# EAGLE board warp-revB (EAGLE 9.4.2)
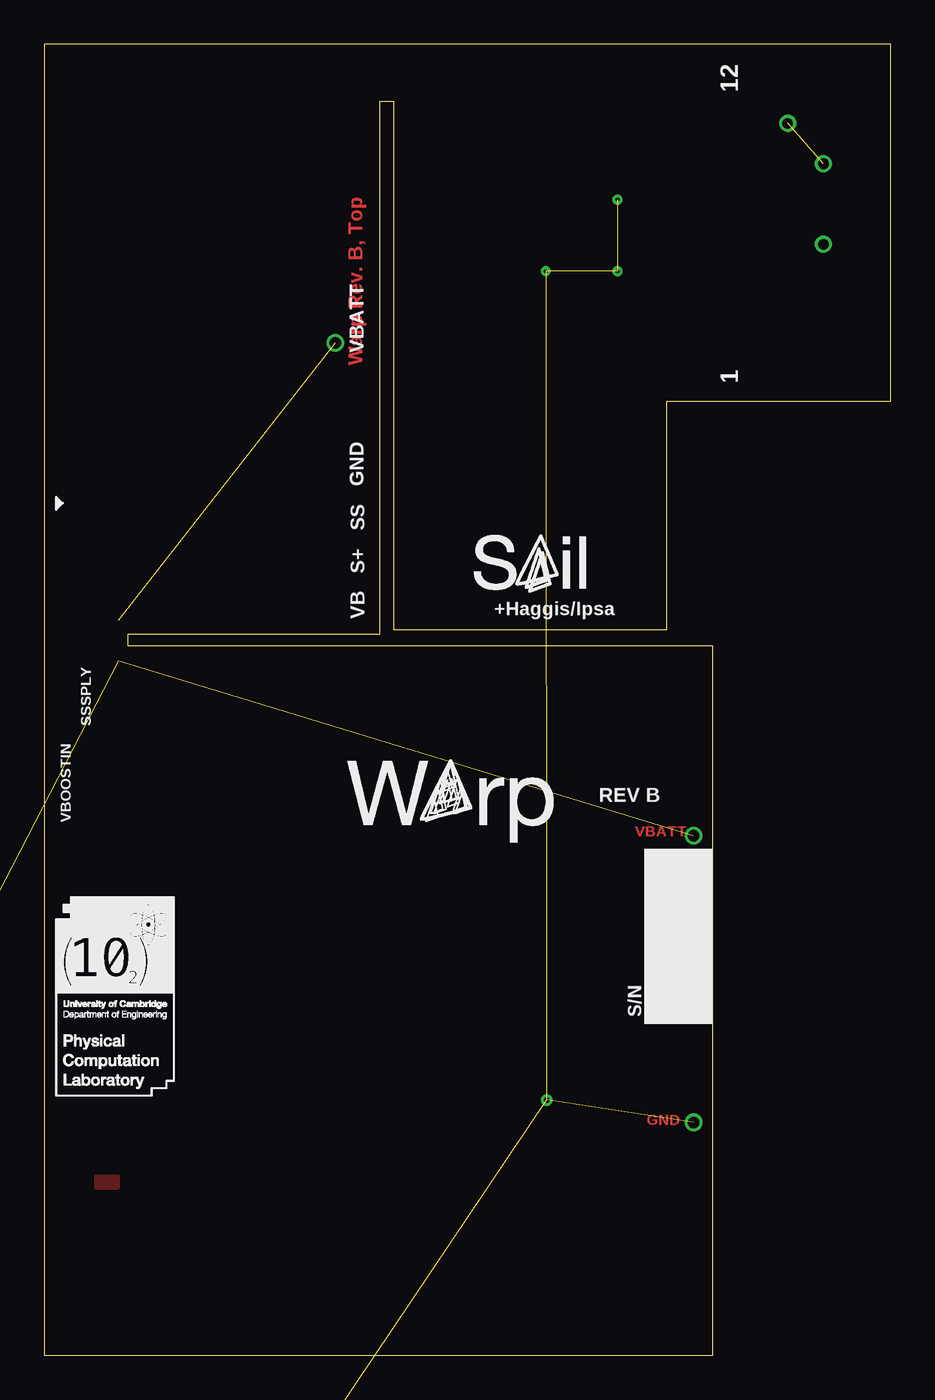
[diagram p0: board, top side]
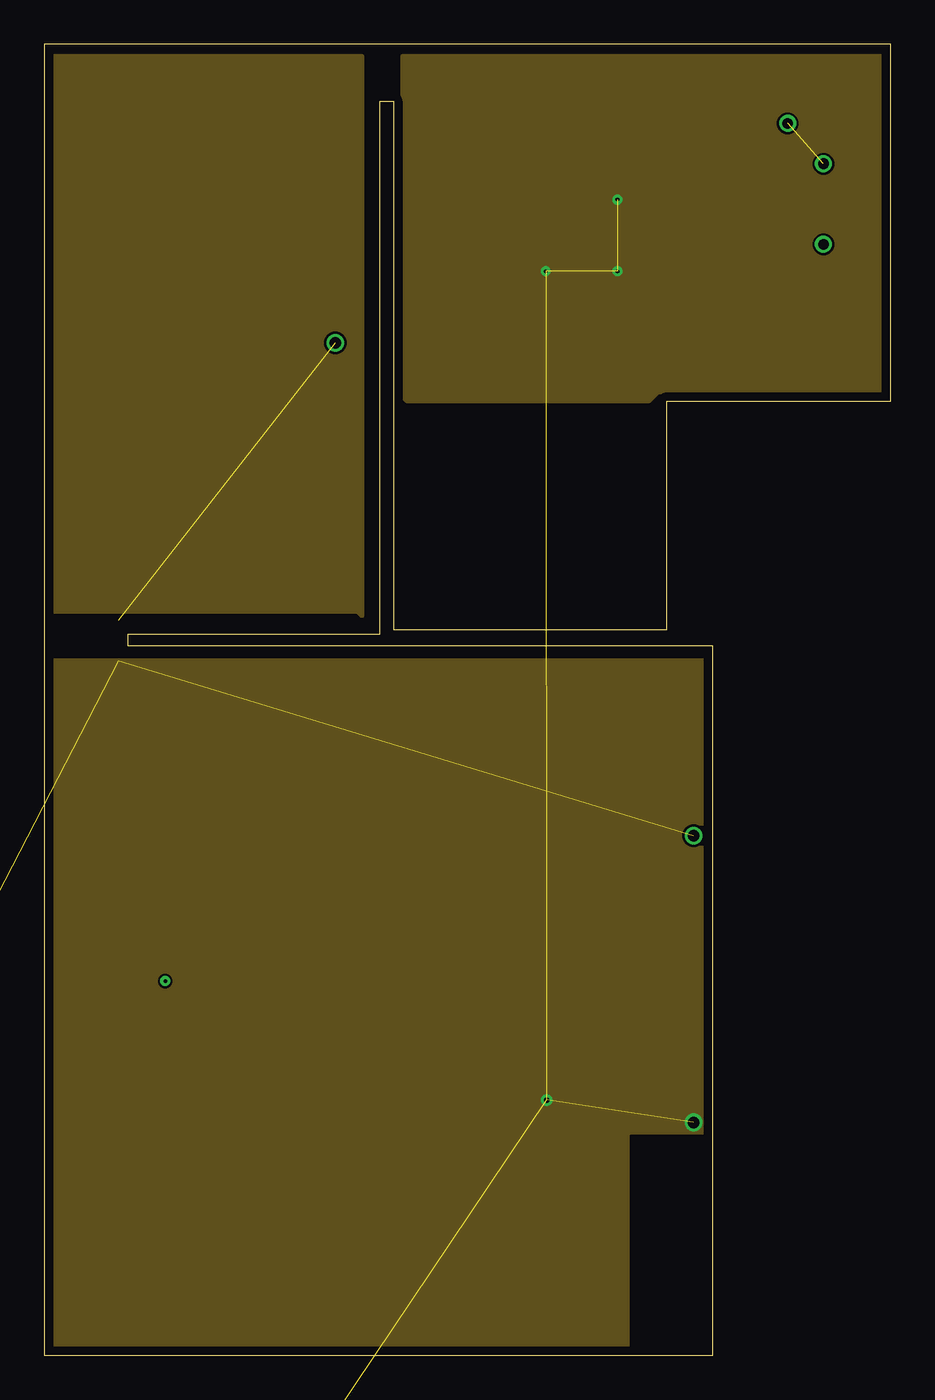
[diagram p1: board, inner layer Route2]
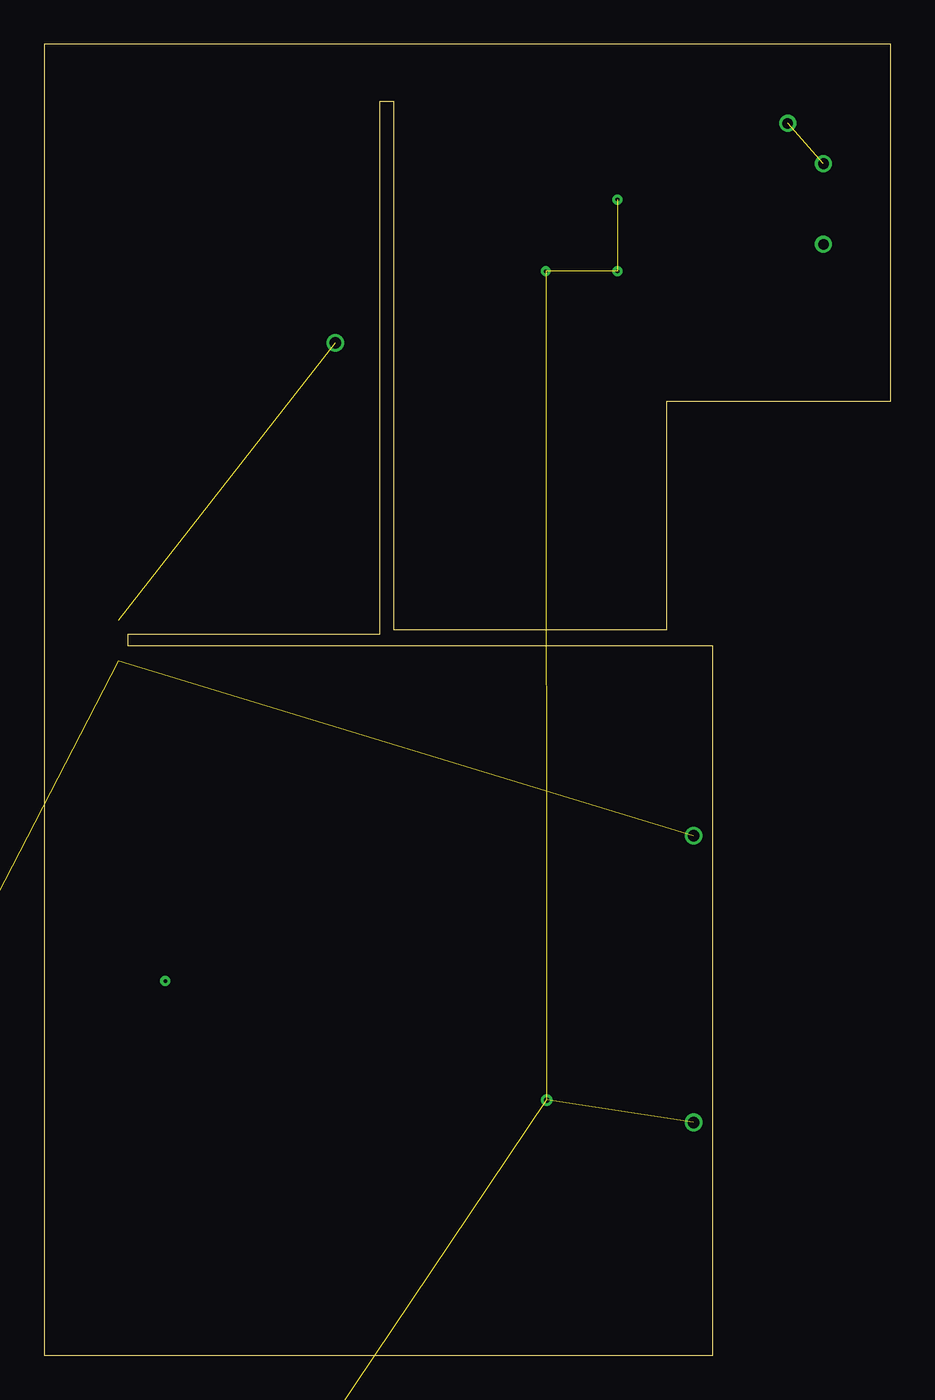
[diagram p2: board, inner layer Route3]
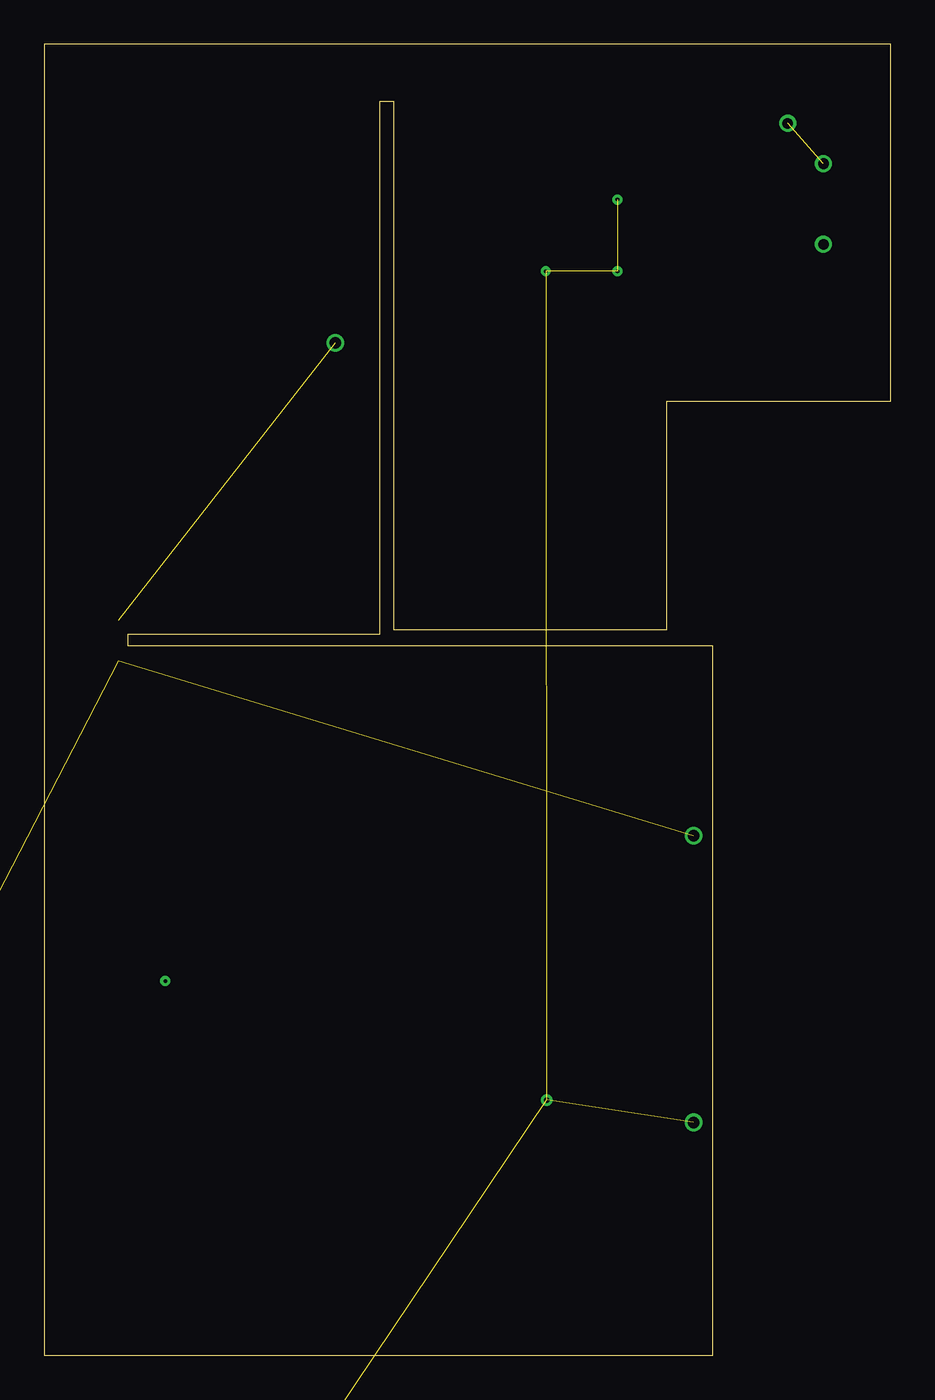
[diagram p3: board, inner layer Route4]
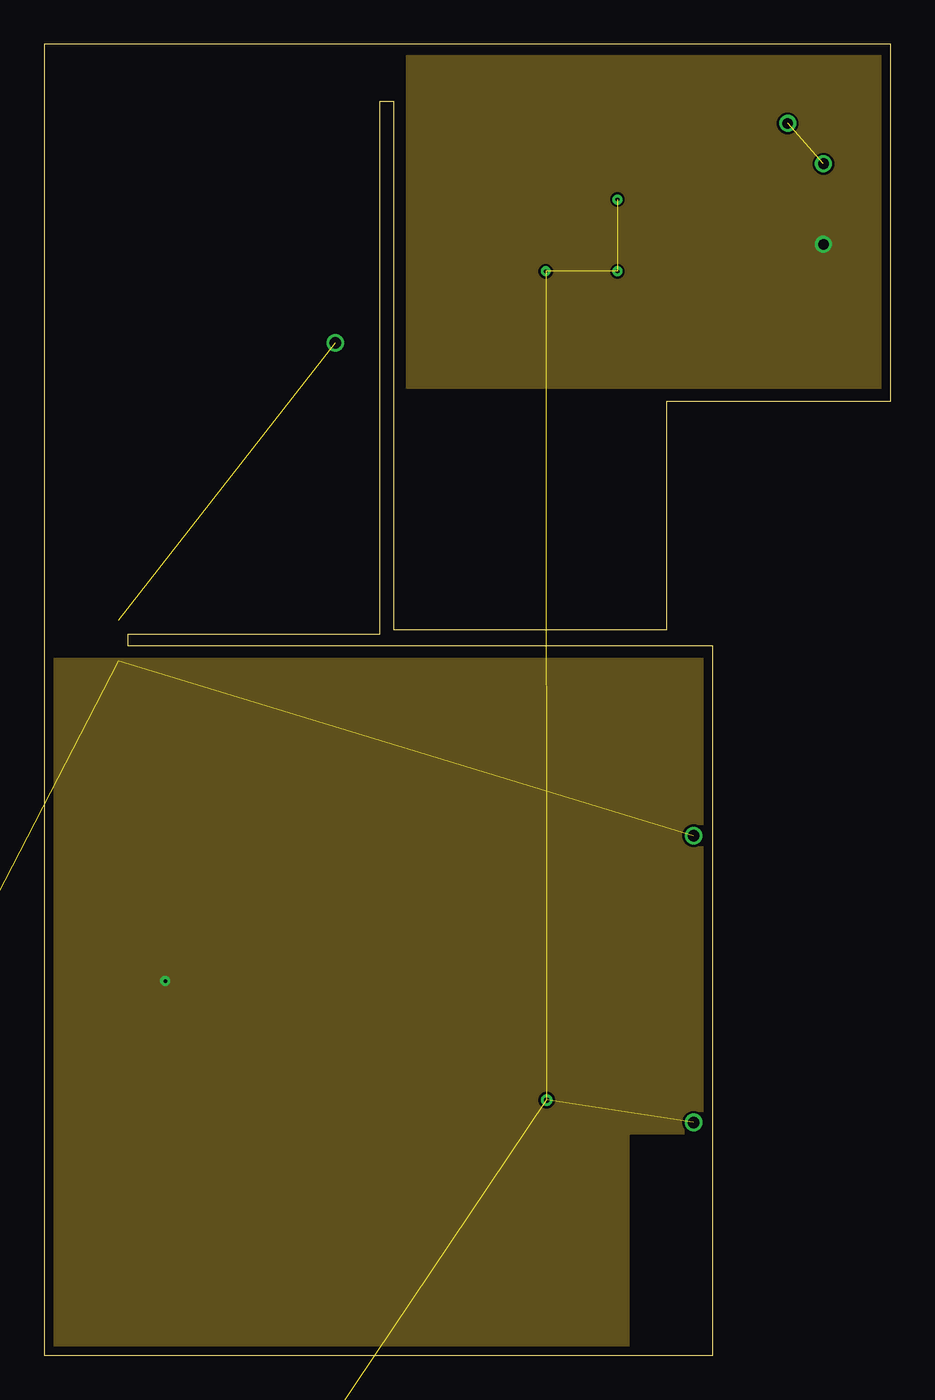
[diagram p4: board, inner layer Route5]
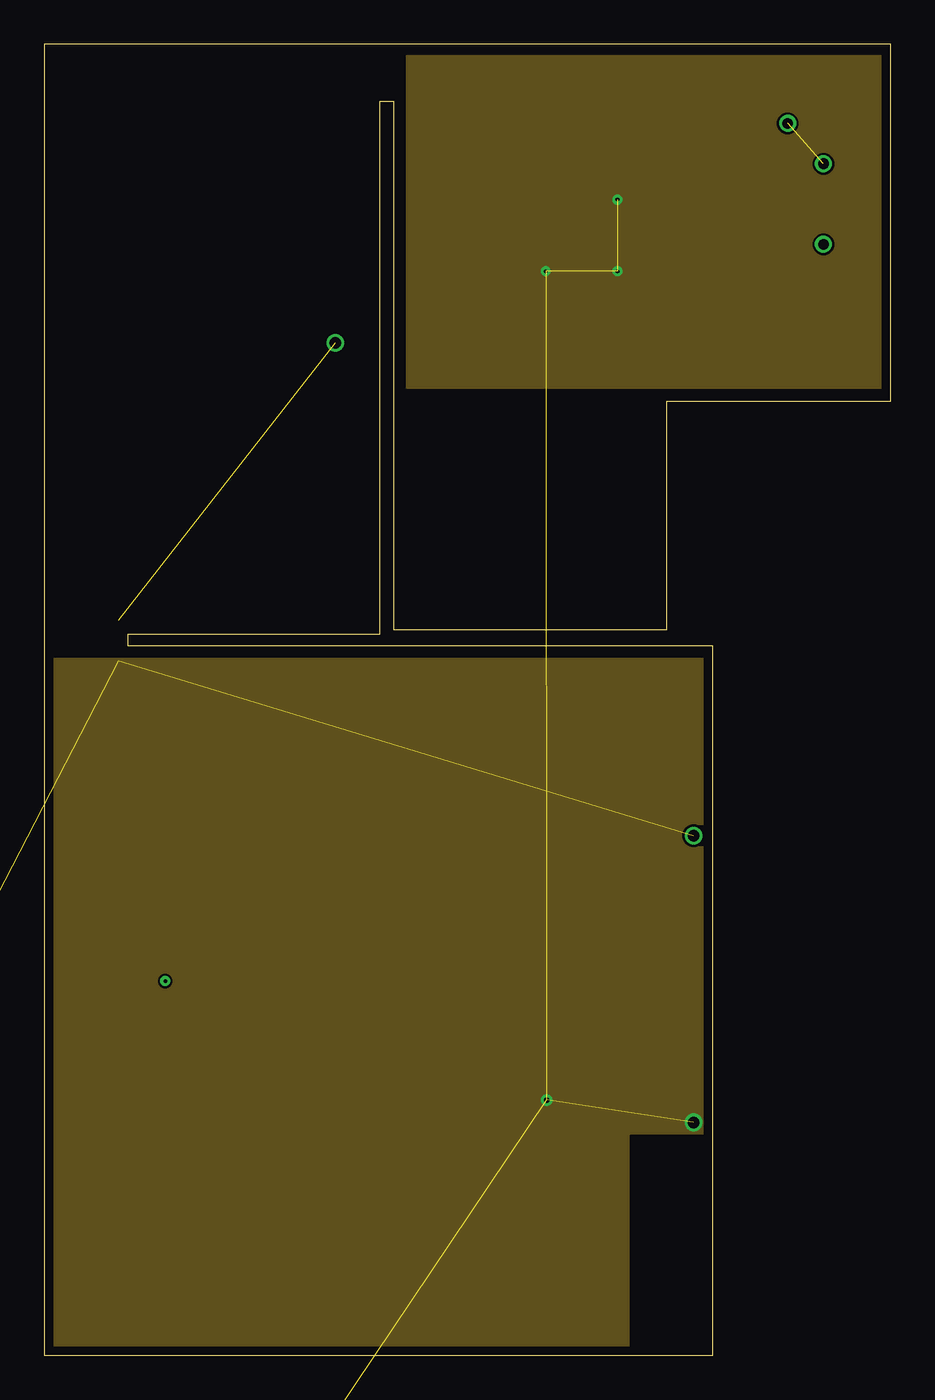
[diagram p5: board, inner layer Route6]
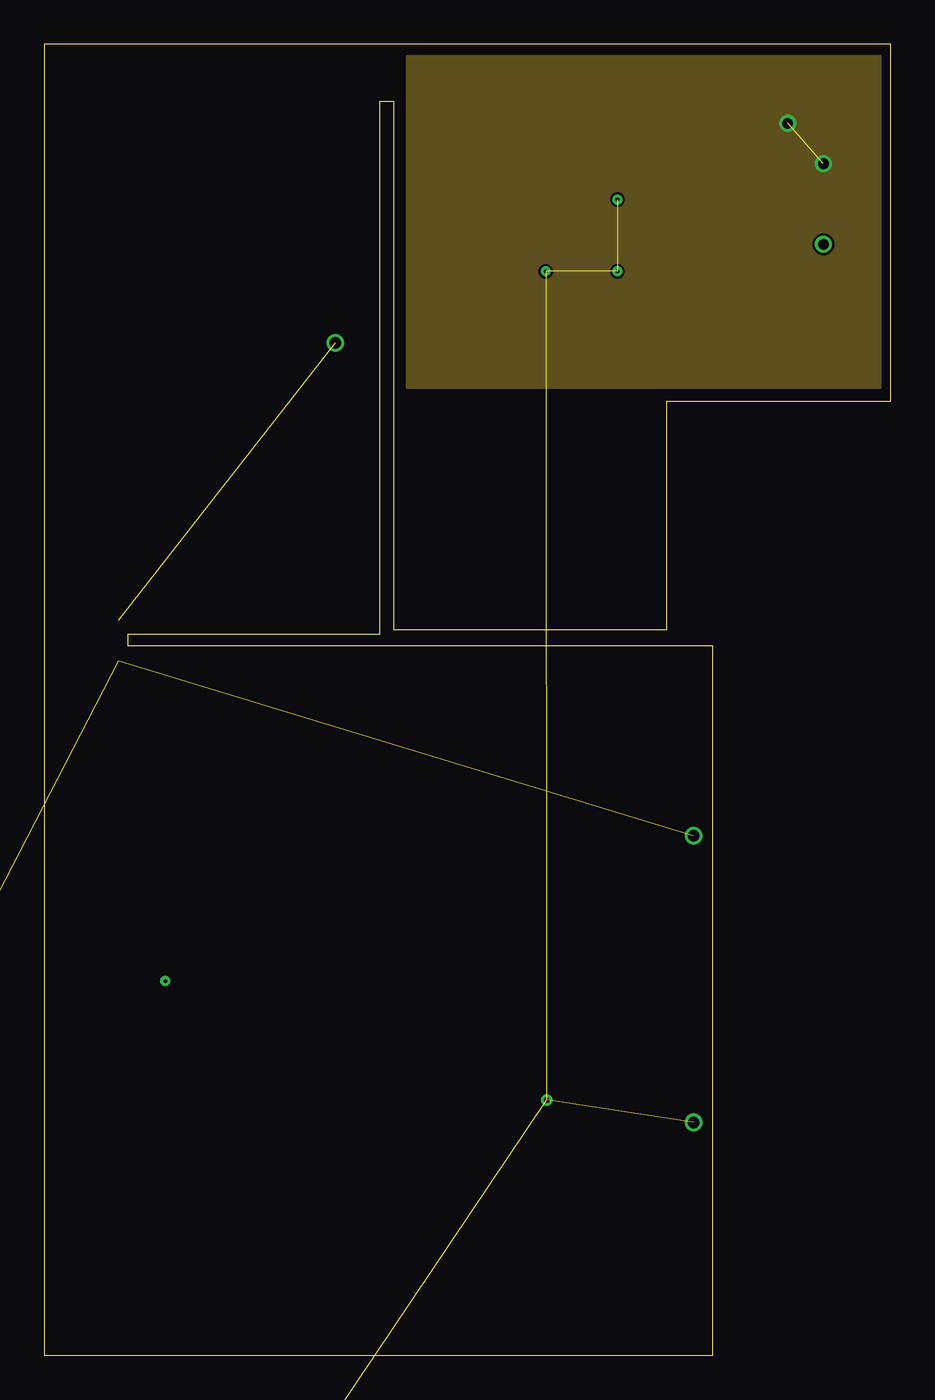
[diagram p6: board, inner layer Route7]
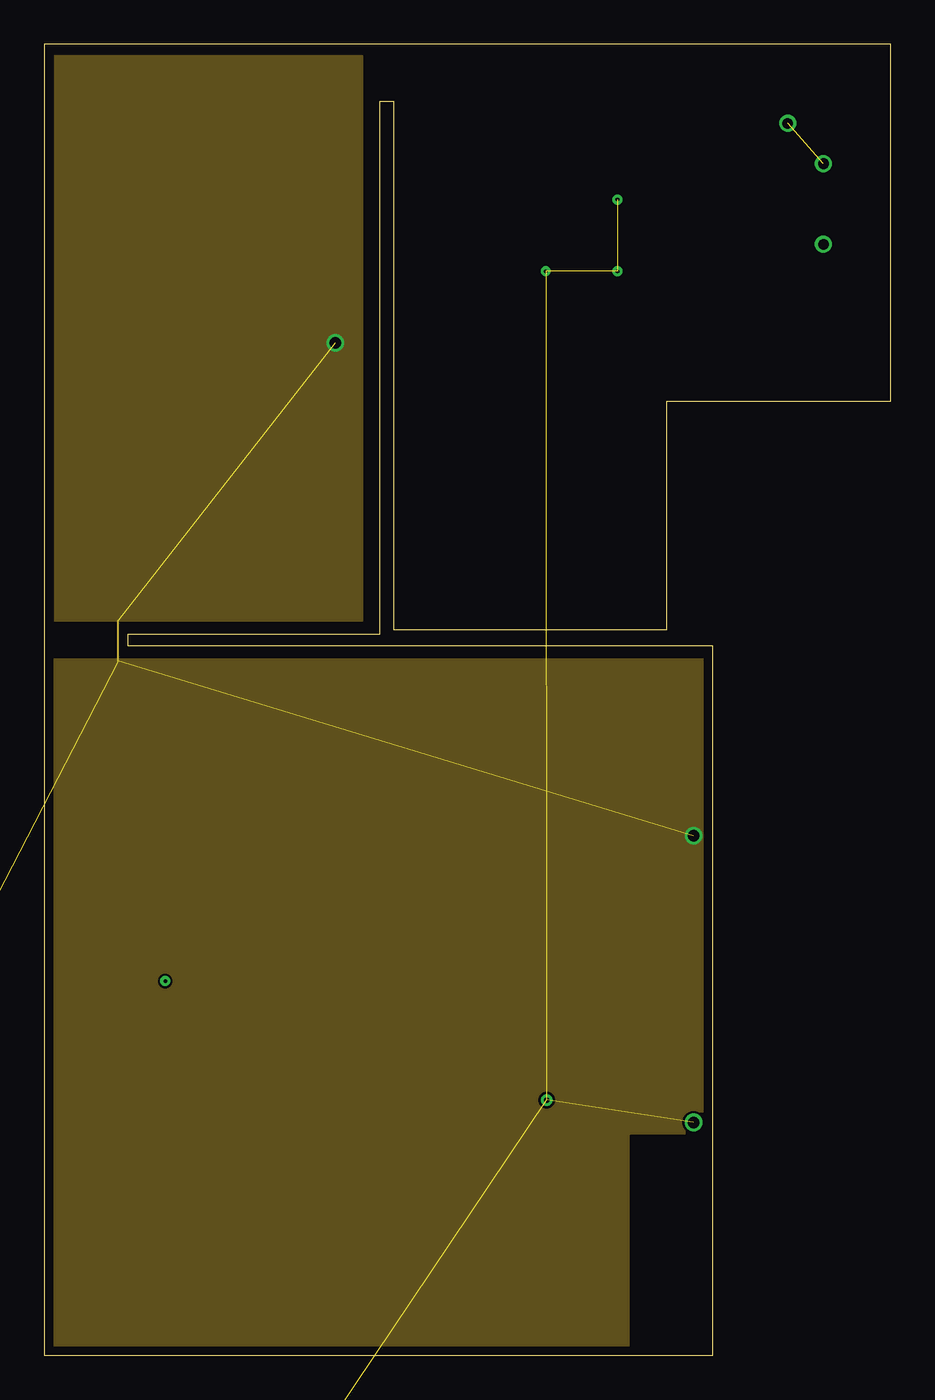
[diagram p7: board, inner layer Route14]
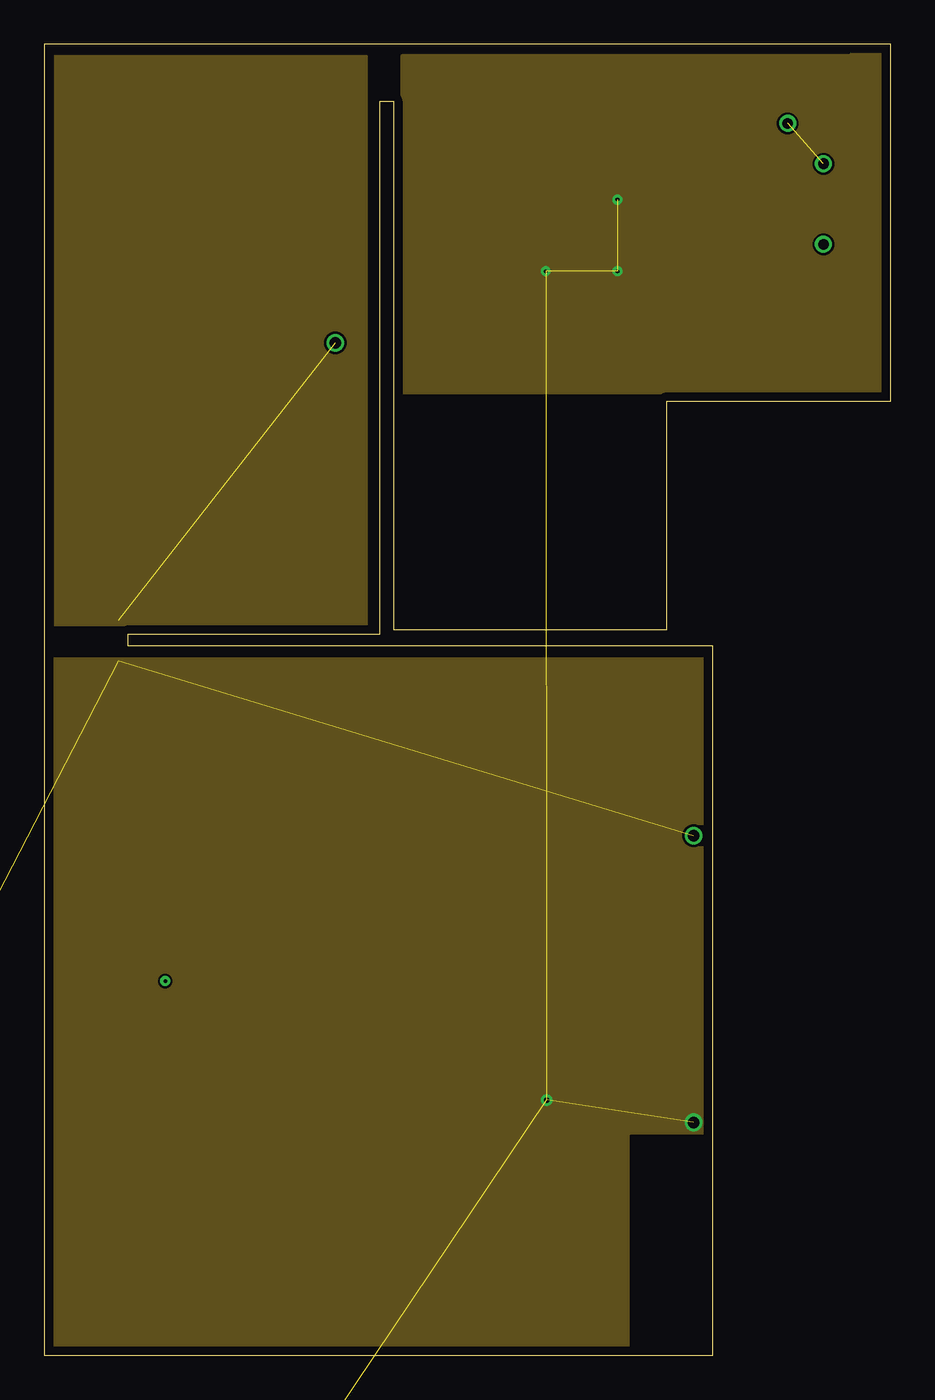
[diagram p8: board, inner layer Route15]
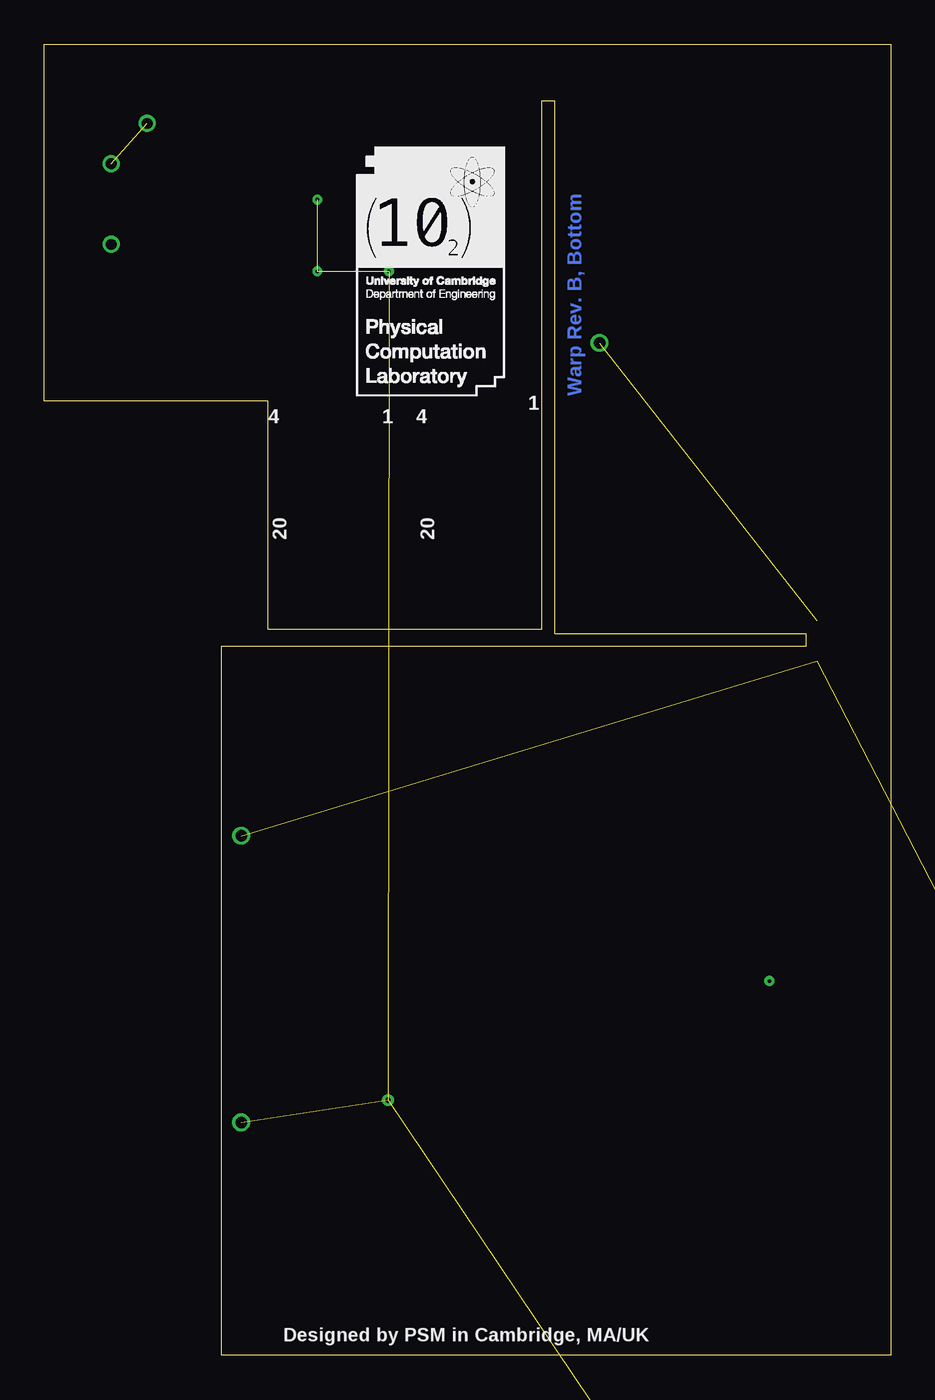
[diagram p9: board, bottom side, seen from below]

Size 48.01 x 74.35 mm. Coordinates in mm from the lower left corner, seen from the top.
Outline: 0,0 37.93,0 37.93,40.23 4.78,40.23 4.78,40.89 19.05,40.89 19.05,71.12 19.81,71.12 19.81,41.15 35.31,41.15 35.31,54.1 48.01,54.1 48.01,74.35 0,74.35 0,0
Copper layers (1+2*3+4*5+6*7+14*15+16): Top 0.035mm / dielectric 0.1mm / Route2 0.035mm / dielectric 0.18mm / Route3 0.035mm / dielectric 0.1mm / Route4 0.035mm / dielectric 0.15mm / Route5 0.035mm / dielectric 0.2mm / Route6 0.035mm / dielectric 0.15mm / Route7 0.035mm / dielectric 0.2mm / Route14 0.035mm / dielectric 0.18mm / Route15 0.035mm / dielectric 0.1mm / Bottom 0.035mm
Design rules "default": minimum track width 5mil, minimum drill 8mil, track to track 5mil, track to pad 5mil, pad to pad 5mil, via to via 6mil, smd to smd 5mil, copper to edge 20mil, drill to drill 15mil, minimum pad ring 7mil, minimum via ring 7mil, stop-mask expansion 4mil, vias tented up to drill 10mil, thermal gap 10mil
tKeepout: area 33.3,0.3 to 37.6,12.4
bKeepout: area 33.3,0.3 to 37.6,12.4
tRestrict: area 7.4,54.6 to 10.9,58.4

## Footprints (pad centres in the part's own frame; a part is rotated, then mirrored left to right if it is on the bottom)
CPX3225A752D = smd 1.4 x 1.4: + -1.1,0; - 1.1,0
0805 = smd 0.8 x 1.2: 1 -0.9,0; 2 0.9,0
0603-CAP = smd 1.1 x 1: 1 -0.85,0; 2 0.85,0
WE-TPC_3816 = smd 0.6 x 4.3: 1 -1.8,0; 2 1.8,0
WE-TPC_2811/2813_OLD = smd 1 x 3.2: 1 -1.1,0; 2 1.1,0
0402-RES = smd 0.7 x 0.9: 1 -0.65,0; 2 0.65,0
TP06R = smd 0.6 x 0.6: TP 0,0
BQ25570 = smd 0.85 x 0.28: 1 -1.725,1; 2 -1.725,0.5; 3 -1.725,0; 4 -1.725,-0.5; 5 -1.725,-1; 11 1.725,-1; 12 1.725,-0.5; 13 1.725,0; 14 1.725,0.5; 15 1.725,1 | smd 0.28 x 0.85: 6 -1,-1.725; 7 -0.5,-1.725; 8 0,-1.725; 9 0.5,-1.725; 10 1,-1.725; 16 1,1.725; 17 0.5,1.725; 18 0,1.725; 19 -0.5,1.725; 20 -1,1.725 | smd 2.05 x 2.05: 21 0,0
LED-0603 = smd 1 x 1: A -0.877,0; C 0.877,0
PVQFN-N16 = smd 0.28 x 0.85: 1 -0.75,-1.475; 2 -0.25,-1.475; 3 0.25,-1.475; 4 0.75,-1.475; 9 0.75,1.475; 10 0.25,1.475; 11 -0.25,1.475; 12 -0.75,1.475 | smd 0.85 x 0.28: 5 1.475,-0.75; 6 1.475,-0.25; 7 1.475,0.25; 8 1.475,0.75; 13 -1.475,0.75; 14 -1.475,0.25; 15 -1.475,-0.25; 16 -1.475,-0.75 | smd 1.7 x 1.7: EP 0,0
DF40C-20DP-0.4V(51) = smd 0.2 x 1.14: P$1 0,0; P$2 0.4,0; P$3 0.8,0; P$4 1.2,0; P$5 1.6,0; P$6 2,0; P$7 2.4,0; P$8 2.8,0; P$9 3.2,0; P$10 3.6,0; P$11 0,-2.71; P$12 0.4,-2.71; P$13 0.8,-2.71; P$14 1.2,-2.71; P$15 1.6,-2.71; P$16 2,-2.71; P$17 2.4,-2.71; P$18 2.8,-2.71; P$19 3.2,-2.71; P$20 3.6,-2.71
FIDUCIAL-1X2 = smd 1 x 1: 1 0,0
0402-CAP = smd 0.7 x 0.9: 1 -0.65,0; 2 0.65,0
WURTH-744025002 = smd 1 x 3.2: 1 -1.1,0; 2 1.1,0
DSBGA = smd 0.25 x 0.25: A1 -0.2,0.6; A2 0.2,0.6; B1 -0.2,0.2; B2 0.2,0.2; C1 -0.2,-0.2; C2 0.2,-0.2; D1 -0.2,-0.6; D2 0.2,-0.6
LATTICE-WLCSP-30 = smd 0.26 x 0.26: A1 -0.8,1; A2 -0.4,1; A3 0,1; A4 0.4,1; A5 0.8,1; B1 -0.8,0.6; B2 -0.4,0.6; B3 0,0.6; B4 0.4,0.6; B5 0.8,0.6; C1 -0.8,0.2; C2 -0.4,0.2; C3 0,0.2; C4 0.4,0.2; C5 0.8,0.2; D1 -0.8,-0.2; D2 -0.4,-0.2; D3 0,-0.2; D4 0.4,-0.2; D5 0.8,-0.2; E1 -0.8,-0.6; E2 -0.4,-0.6; E3 0,-0.6; E4 0.4,-0.6; E5 0.8,-0.6; F1 -0.8,-1; F2 -0.4,-1; F3 0,-1; F4 0.4,-1; F5 0.8,-1
0402 = smd 0.85 x 0.9: 1 -0.58,0; 2 0.58,0
FT4222H = smd 0.25 x 0.4: P$1 -1.75,-2.3; P$2 -1.25,-2.3; P$3 -0.75,-2.3; P$4 -0.25,-2.3; P$5 0.25,-2.3; P$6 0.75,-2.3; P$7 1.25,-2.3; P$8 1.75,-2.3; P$17 1.75,2.3; P$18 1.25,2.3; P$19 0.75,2.3; P$20 0.25,2.3; P$21 -0.25,2.3; P$22 -0.75,2.3; P$23 -1.25,2.3; P$24 -1.75,2.3 | smd 0.4 x 0.25: P$9 2.3,-1.75; P$10 2.3,-1.25; P$11 2.3,-0.75; P$12 2.3,-0.25; P$13 2.3,0.25; P$14 2.3,0.75; P$15 2.3,1.25; P$16 2.3,1.75; P$25 -2.3,1.75; P$26 -2.3,1.25; P$27 -2.3,0.75; P$28 -2.3,0.25; P$29 -2.3,-0.25; P$30 -2.3,-0.75; P$31 -2.3,-1.25; P$32 -2.3,-1.75 | smd 1 x 1: P$33 -0.75,1; P$34 0.75,1; P$35 0.75,-1; P$36 -0.75,-1
CS325 = smd 1.4 x 1.15: 1 -1.1,-0.8; 2 1.1,-0.8; 3 1.1,0.8; 4 -1.1,0.8
JST-2-SMD = smd 1 x 4.6: 1 -1,-3.7; 2 1,-3.7 | smd 1.6 x 3.4: NC1 -3.4,1.5; NC2 3.4,1.5
1X04_1MM_RA = smd 0.6 x 1.35: 1 -1.5,0; 2 -0.5,0; 3 0.5,0; 4 1.5,0 | smd 1.2 x 2: NC1 2.8,-3.675; NC2 -2.8,-3.675
DF40C-20DP-0.4V(51)' = smd 0.24 x 0.66: P$1 0,0; P$2 0.4,0; P$3 0.8,0; P$4 1.2,0; P$5 1.6,0; P$6 2,0; P$7 2.4,0; P$8 2.8,0; P$9 3.2,0; P$10 3.6,0; P$11 0,-2.71; P$12 0.4,-2.71; P$13 0.8,-2.71; P$14 1.2,-2.71; P$15 1.6,-2.71; P$16 2,-2.71; P$17 2.4,-2.71; P$18 2.8,-2.71; P$19 3.2,-2.71; P$20 3.6,-2.71 | smd 0.36 x 0.66: P$21 -0.46,0; P$22 4.06,0; P$23 -0.46,-2.71; P$24 4.06,-2.71
SAMTECH_FTSH-105-01 = smd 0.508 x 1.27: 1 -2.54,-2.413; 2 -2.54,2.413; 3 -1.27,-2.413; 4 -1.27,2.413; 5 0,-2.413; 6 0,2.413; 7 1.27,-2.413; 8 1.27,2.413; 9 2.54,-2.413; 10 2.54,2.413
EVPAYG0BA = smd 0.75 x 0.75: A 0.375,2.22; A' 3.525,2.22; B 0.375,0.38; B' 3.525,0.38
MKL03Z32VFK4R = smd 0.4 x 0.2: P$1 -1.85,1.25; P$2 -1.85,0.75; P$3 -1.85,0.25; P$4 -1.85,-0.25; P$5 -1.85,-0.75; P$6 -1.85,-1.25; P$13 1.85,-1.25; P$14 1.85,-0.75; P$15 1.85,-0.25; P$16 1.85,0.25; P$17 1.85,0.75; P$18 1.85,1.25 | smd 0.2 x 0.4: P$7 -1.25,-1.85; P$8 -0.75,-1.85; P$9 -0.25,-1.85; P$10 0.25,-1.85; P$11 0.75,-1.85; P$12 1.25,-1.85; P$19 1.25,1.85; P$20 0.75,1.85; P$21 0.25,1.85; P$22 -0.25,1.85; P$23 -0.75,1.85; P$24 -1.25,1.85 | smd 2.9 x 2.9: P$PAD 0,0
UDFN = smd 0.6 x 0.4: 1 -2.7,1.905; 2 -2.7,0.635; 3 -2.7,-0.635; 4 -2.7,-1.905; 5 2.7,-1.905; 6 2.7,-0.635; 7 2.7,0.635; 8 2.7,1.905 | smd 3.4 x 4: 9 0,0
CM519 = smd 1.3 x 2.2: P$1 0,0; P$2 4.2,0
WE-TPC_2828_OLD = smd 1 x 3.2: 1 -1.1,0; 2 1.1,0
WSON-12 = smd 0.25 x 0.5: 1 -1.25,-0.95; 2 -0.75,-0.95; 3 -0.25,-0.95; 4 0.25,-0.95; 5 0.75,-0.95; 6 1.25,-0.95; 7 1.25,0.95; 8 0.75,0.95; 9 0.25,0.95; 10 -0.25,0.95; 11 -0.75,0.95; 12 -1.25,0.95 | smd 2 x 0.9: PAD 0,0
PAN1326B = smd 0.6 x 0.6: A -4,2.8; B 3.9,2.8; C -4,4.6; D 3.9,4.6; P$1 -2.75,-3.5; P$2 -1.85,-2.5; P$3 -0.95,-3.5; P$4 -0.05,-2.5; P$5 0.85,-3.5; P$6 1.75,-2.5; P$7 2.65,-3.5; P$8 3.9,-2.6; P$9 2.9,-1.7; P$10 3.9,-0.8; P$11 2.9,0.1; P$12 3.9,1; P$13 2.65,1.9; P$14 1.75,0.9; P$15 0.85,1.9; P$16 -0.05,0.9; P$17 -0.95,1.9; P$18 -1.85,0.9; P$19 -2.75,1.9; P$20 -4,1; P$21 -3,0.1; P$22 -4,-0.8; P$23 -3,-1.7; P$24 -4,-2.6
SI4705 = smd 0.3 x 0.3: P$1 -1.31,1.28; P$6 -1.31,-1.25; P$11 1.22,-1.25; P$16 1.22,1.28 | smd 0.61 x 0.28: P$2 -1.4,0.75; P$3 -1.4,0.25; P$4 -1.4,-0.25; P$5 -1.4,-0.75; P$12 1.31,-0.75; P$13 1.31,-0.25; P$14 1.31,0.25; P$15 1.31,0.75 | smd 0.28 x 0.61: P$7 -0.8,-1.35; P$8 -0.3,-1.35; P$9 0.2,-1.35; P$10 0.7,-1.35; P$17 0.7,1.36; P$18 0.2,1.36; P$19 -0.3,1.36; P$20 -0.8,1.36 | smd 1.7 x 1.7: P$21 -0.05,0
SOD-323 = smd 0.63 x 0.83: A 1.15,0; C -1.15,0
SOT23 = smd 1 x 1.4: 1 -0.95,-1.1; 2 0.95,-1.1; 3 0,1.1
RV-C7 = smd 0.5 x 0.8: 1 1.35,0.6; 2 0.45,0.6; 3 -0.45,0.6; 4 -1.35,0.6; 5 -1.35,-0.6; 6 -0.45,-0.6; 7 0.45,-0.6; 8 1.35,-0.6
ML414 = smd 1.4 x 2.79: 1 -3.365,0; 3 3.365,0 | smd 3.18 x 3.18: 2 0,0
CHS-02_SWITCH = smd 0.76 x 1.6: 1 -1.905,-2.54; 1' -1.905,2.54; 2 -0.635,-2.54; 2' -0.635,2.54
CHS-04_SWITCH = smd 0.76 x 1.6: 1 -1.905,-2.54; 1' -1.905,2.54; 2 -0.635,-2.54; 2' -0.635,2.54; 3 0.635,-2.54; 3' 0.635,2.54; 4 1.905,-2.54; 4' 1.905,2.54
ADXL362 = smd 0.925 x 0.3: P$1 -1.274,1.001; P$2 -1.274,0.501; P$3 -1.274,0.001; P$4 -1.274,-0.499; P$5 -1.274,-0.999; P$9 1.476,-1.024; P$10 1.476,-0.524; P$11 1.476,-0.024; P$12 1.476,0.476; P$13 1.476,0.976 | smd 0.3 x 0.925: P$6 -0.399,-1.324; P$7 0.101,-1.324; P$8 0.601,-1.324; P$14 0.601,1.301; P$15 0.101,1.301; P$16 -0.399,1.301
BME680 = smd 0.4 x 0.4: 1 1.2,1.2; 2 1.2,0.4; 3 1.2,-0.4; 4 1.2,-1.2; 5 -1.2,-1.2; 6 -1.2,-0.4; 7 -1.2,0.4; 8 -1.2,1.2
BMX055 = smd 0.25 x 0.675: P$1 -1.536,1.226; P$2 -1.036,1.226; P$3 -0.536,1.226; P$4 -0.036,1.226; P$5 0.464,1.226; P$6 0.964,1.226; P$7 1.464,1.226; P$11 1.464,-1.274; P$12 0.964,-1.274; P$13 0.464,-1.274; P$14 -0.036,-1.274; P$15 -0.536,-1.274; P$16 -1.036,-1.274; P$17 -1.536,-1.274 | smd 0.675 x 0.25: P$8 1.989,0.476; P$9 1.989,-0.024; P$10 1.989,-0.524; P$18 -2.051,-0.524; P$19 -2.051,-0.024; P$20 -2.051,0.476
TCS3772 = smd 1.2 x 0.35: P$1 -0.8,0.7; P$2 -0.8,0.05; P$3 -0.8,-0.6; P$4 0.7,-0.6; P$5 0.7,0.05; P$6 0.7,0.7
GRIDEYE-AMG88 = smd 0.8 x 3.6: 1 -5.5,-2.55 | smd 0.7 x 2.6: 2 -2.54,-3.05; 3 -1.27,-3.05; 4 0,-3.05; 5 1.27,-3.05; 6 2.54,-3.05; 9 2.54,3.05; 10 1.27,3.05; 11 0,3.05; 12 -1.27,3.05; 13 -2.54,3.05 | smd 0.8 x 2.6: 7 5.5,-3.05; 8 5.5,3.05; 14 -5.5,3.05
LGA10 = smd 0.7 x 0.4: 1 -1.1,1.2; 2 -1.1,0.6; 3 -1.1,0; 4 -1.1,-0.6; 5 -1.1,-1.2; 6 1.1,-1.2; 7 1.1,-0.6; 8 1.1,0; 9 1.1,0.6; 10 1.1,1.2 | smd 1.1 x 2.45: EP 0,0
ISL23415 = smd 0.2 x 0.6: 1 0.75,0.7; 2 0.25,0.7; 3 -0.25,0.7; 4 -0.75,0.7; 6 -0.75,-0.7; 7 -0.25,-0.7; 8 0.25,-0.7; 9 0.75,-0.7 | smd 0.6 x 0.2: 5 -0.95,0; 10 0.95,0
HDC1000 = smd 0.275 x 0.275: A1 -0.5,0.8; A2 0.5,0.8; B1 -0.5,0.3; B2 0.5,0.3; C1 -0.5,-0.2; C2 0.5,-0.2; D1 -0.5,-0.7; D2 0.5,-0.7
L3GD20H = smd 0.4 x 0.3: P$1 -1.324,0.976; P$2 -1.324,0.476; P$3 -1.324,-0.024; P$4 -1.324,-0.524; P$5 -1.324,-1.024; P$9 1.276,-1.024; P$10 1.276,-0.524; P$11 1.276,-0.024; P$12 1.276,0.476; P$13 1.276,0.976 | smd 0.3 x 0.4: P$6 -0.524,-1.324; P$7 -0.024,-1.324; P$8 0.476,-1.324; P$14 0.476,1.276; P$15 -0.024,1.276; P$16 -0.524,1.276
MAG3110 = smd 0.6 x 0.225: P$1 -0.916,0.784; P$2 -0.916,0.384; P$3 -0.916,-0.016; P$4 -0.916,-0.416; P$5 -0.916,-0.816; P$6 0.884,-0.816; P$7 0.884,-0.416; P$8 0.884,-0.016; P$9 0.884,0.384; P$10 0.884,0.784
MMA8451Q = smd 0.6 x 0.3: P$1 -1.274,0.976; P$2 -1.274,0.476; P$3 -1.274,-0.024; P$4 -1.274,-0.524; P$5 -1.274,-1.024; P$9 1.226,-1.024; P$10 1.226,-0.524; P$11 1.226,-0.024; P$12 1.226,0.476; P$13 1.226,0.976 | smd 0.3 x 0.6: P$6 -0.524,-1.274; P$7 -0.024,-1.274; P$8 0.476,-1.274; P$14 0.476,1.226; P$15 -0.024,1.226; P$16 -0.524,1.226
SI7021 = smd 0.85 x 0.45: P$1 -1.5,1.05; P$2 -1.5,0.05; P$3 -1.5,-0.95; P$4 1.4,-0.95; P$5 1.4,0.05; P$6 1.4,1.05 | smd 1.6 x 2.5: P$7 -0.05,0.05
LPS25H = smd 0.4 x 0.55: P$1 0.3,0.9; P$2 -0.3,0.9; P$6 -0.3,-0.9; P$7 0.3,-0.9 | smd 0.55 x 0.4: P$3 -0.9,0.6; P$4 -0.9,0; P$5 -0.9,-0.6; P$8 0.9,-0.6; P$9 0.9,0; P$10 0.9,0.6
0603 = smd 1.1 x 1: 1 -0.85,0; 2 0.85,0
ZX62-AB-5PA(31) = smd 0.4 x 1.35: 1 -1.3,2.55; 2 -0.65,2.55; 3 0,2.55; 4 0.65,2.55; 5 1.3,2.55 | smd 1.8 x 1.9: P$2 -4,0; P$3 4,0; P$4 -1.15,0; P$5 1.15,0 | smd 2.1 x 1.6: P$10 3.1,2.55; P$11 -3.1,2.55

## Placement (x,y rotation side)
BOOST:C1  CPX3225A7552D  [CPX3225A752D]  -150.11,-253.75 0 top  (outside the outline)
BOOST:C2  CPX3225A7552D  [CPX3225A752D]  -150.11,-258.83 0 top  (outside the outline)
BOOST:C4  CPX3225A7552D  [CPX3225A752D]  -150.11,-263.91 0 top  (outside the outline)
BOOST:C5  CPX3225A7552D  [CPX3225A752D]  -150.11,-268.99 0 top  (outside the outline)
BOOST:C6  CPX3225A7552D  [CPX3225A752D]  -150.11,-274.07 0 top  (outside the outline)
BOOST:C7  CPX3225A7552D  [CPX3225A752D]  -150.11,-279.15 0 top  (outside the outline)
BOOST:C8  CPX3225A7552D  [CPX3225A752D]  -150.11,-284.23 0 top  (outside the outline)
BOOST:C9  CPX3225A7552D  [CPX3225A752D]  -150.11,-289.31 0 top  (outside the outline)
BOOST:C42  4.7uF  [0805]  -135.38,-220.98 0 top  (outside the outline)
BOOST:C43  0.1uF  [0603-CAP]  -126.24,-218.19 0 top  (outside the outline)
BOOST:C44  4.7uF  [0805]  -132.33,-220.98 0 top  (outside the outline)
BOOST:C45  10nF  [0603-CAP]  -126.24,-221.23 0 top  (outside the outline)
BOOST:C49  22uF  [0805]  -129.29,-220.98 0 top  (outside the outline)
BOOST:L2  22uH  [WE-TPC_3816]  -467.87,-1221.23 0 top  (outside the outline)
BOOST:L3  10uH  [WE-TPC_2811/2813_OLD]  -462.53,-1222.25 0 top  (outside the outline)
BOOST:R16  4.02M  [0402-RES]  -151.89,-231.14 0 top  (outside the outline)
BOOST:R17  1.3M  [0402-RES]  -151.89,-234.19 0 top  (outside the outline)
BOOST:R18  6.49M  [0402-RES]  -151.89,-237.24 0 top  (outside the outline)
BOOST:R19  5.36M  [0402-RES]  -151.89,-240.28 0 top  (outside the outline)
BOOST:R20  9.09M  [0402-RES]  -151.89,-243.33 0 top  (outside the outline)
BOOST:R21  8.87M  [0402-RES]  -151.89,-246.38 0 top  (outside the outline)
BOOST:R22  4.22M  [0402-RES]  -151.89,-249.43 0 top  (outside the outline)
BOOST:TP1  TPSTP06R  [TP06R]  -443.23,-1136.65 0 top  (outside the outline)
BOOST:TP2  TPSTP06R  [TP06R]  -144.27,-225.3 0 top  (outside the outline)
BOOST:TP3  TPSTP06R  [TP06R]  -144.27,-228.6 0 top  (outside the outline)
BOOST:TP4  TPSTP06R  [TP06R]  -443.23,-1139.95 0 top  (outside the outline)
BOOST:U21  BQ25570PVQFN  [BQ25570]  -124.97,-212.09 0 top  (outside the outline)
CHARGER:C1  1uF  [0805]  -335.28,-1039.37 0 top  (outside the outline)
CHARGER:C2  4.7uF  [0805]  -338.33,-1039.37 0 top  (outside the outline)
CHARGER:C3  4.7uF  [0805]  -341.38,-1039.37 0 top  (outside the outline)
CHARGER:D1  [LED-0603]  -358.14,-1101.6 0 top  (outside the outline)
CHARGER:D2  [LED-0603]  -359.16,-1104.39 0 top  (outside the outline)
CHARGER:R1  2.94k  [0402-RES]  -341.12,-1042.92 0 top  (outside the outline)
CHARGER:R2  4.32k  [0402-RES]  -341.12,-1045.46 0 top  (outside the outline)
CHARGER:R3  10k  [0402-RES]  -358.39,-1070.86 0 top  (outside the outline)
CHARGER:R4  4.7k  [0402-RES]  -358.39,-1096.26 0 top  (outside the outline)
CHARGER:R5  4.7k  [0402-RES]  -358.39,-1098.8 0 top  (outside the outline)
CHARGER:R6  56.2k  [0402-RES]  -360.68,-1106.93 0 top  (outside the outline)
CHARGER:TP1  TPSTP06R  [TP06R]  -435.86,-1114.3 0 top  (outside the outline)
CHARGER:TP2  TPSTP06R  [TP06R]  -435.86,-1117.6 0 top  (outside the outline)
CHARGER:U$1  BQ24230VQFN  [PVQFN-N16]  -330.2,-1038.35 0 top  (outside the outline)
DF40_SOCKETS:J1  DF40FC-20DP-0.4V(51)SOCKET  [DF40C-20DP-0.4V(51)]  -498.35,-1320.55 0 top  (outside the outline)
DF40_SOCKETS:J2  DF40FC-20DP-0.4V(51)SOCKET  [DF40C-20DP-0.4V(51)]  -498.35,-1328.42 0 top  (outside the outline)
FD1  FIDUCIAL1X2  [FIDUCIAL-1X2]  -497.59,-1309.88 0 top  (outside the outline)
FD2  FIDUCIAL1X2  [FIDUCIAL-1X2]  -498.35,-1315.21 0 top  (outside the outline)
FD3  FIDUCIAL1X2  [FIDUCIAL-1X2]  -497.84,-1311.66 0 top  (outside the outline)
FD4  FIDUCIAL1X2  [FIDUCIAL-1X2]  -498.6,-1316.99 0 top  (outside the outline)
FD5  FIDUCIAL1X2  [FIDUCIAL-1X2]  -498.09,-1313.43 0 top  (outside the outline)
FPGA:C2  4.7uF  [0805]  -435.36,-1106.68 0 top  (outside the outline)
FPGA:C3  1uF  [0805]  -490.73,-1288.03 0 top  (outside the outline)
FPGA:C4  10nF  [0402-CAP]  -435.1,82.3 0 top  (outside the outline)
FPGA:C5  10uF  [0805]  -487.68,-1266.19 0 top  (outside the outline)
FPGA:C6  0.1uF  [0603-CAP]  -487.68,-1269.49 0 top  (outside the outline)
FPGA:C10  0.1uF  [0603-CAP]  -487.68,-1283.21 0 top  (outside the outline)
FPGA:C11  0.1uF  [0603-CAP]  -487.68,-1285.75 0 top  (outside the outline)
FPGA:C12  0.1uF  [0603-CAP]  -487.68,-1288.29 0 top  (outside the outline)
FPGA:C13  1uF  [0805]  -493.78,-1288.03 0 top  (outside the outline)
FPGA:C14  1uF  [0805]  -496.82,-1288.03 0 top  (outside the outline)
FPGA:C76  10nF  [0402-CAP]  -229.62,-713.49 0 top  (outside the outline)
FPGA:C79  10nF  [0402-CAP]  -229.62,-722.63 0 top  (outside the outline)
FPGA:D1  BLUE  [LED-0603]  -487.17,-1272.79 0 top  (outside the outline)
FPGA:L1  2.2uH  [WURTH-744025002]  -424.18,-1105.15 0 top  (outside the outline)
FPGA:R27  100  [0402-RES]  -229.62,-747.78 0 top  (outside the outline)
FPGA:R41  4.7k  [0402-RES]  -229.62,-689.1 0 top  (outside the outline)
FPGA:R42  DNP  [0402-RES]  -229.62,-734.82 0 top  (outside the outline)
FPGA:R43  10k  [0402-RES]  -229.62,-737.87 0 top  (outside the outline)
FPGA:TP11  TPSTP06R  [TP06R]  -238.51,-761.75 0 top  (outside the outline)
FPGA:U$1  TPS62746DSBGA(8)  [DSBGA]  -429.01,-1106.17 0 top  (outside the outline)
FPGA:U$7  ICE40UP5K-UWG30  [LATTICE-WLCSP-30]  -229.62,-742.95 0 top  (outside the outline)
FT4222:C1  4.7uF  [0805]  -476.76,-1226.82 0 top  (outside the outline)
FT4222:C2  0.1uF  [0603-CAP]  -476.76,-1230.38 0 top  (outside the outline)
FT4222:C62  0.47uF  [0402-CAP]  -476.5,-1233.42 0 top  (outside the outline)
FT4222:C63  100pF  [0402-CAP]  -476.5,-1236.47 0 top  (outside the outline)
FT4222:C64  27pF  [0402-CAP]  -476.5,-1239.52 0 top  (outside the outline)
FT4222:C65  27pF  [0402-CAP]  -476.5,-1242.57 0 top  (outside the outline)
FT4222:R5  [0402]  -477.27,-1252.73 0 top  (outside the outline)
FT4222:R8  [0402]  -477.52,-1256.03 0 top  (outside the outline)
FT4222:R9  [0402]  -477.77,-1259.33 0 top  (outside the outline)
FT4222:R23  [0402]  -476.25,-1246.12 0 top  (outside the outline)
FT4222:R25  [0402]  -476.76,-1249.43 0 top  (outside the outline)
FT4222:U18  FT4222H  [FT4222H]  -483.11,-1257.05 0 top  (outside the outline)
FT4222:Y2  CS325  [CS325]  -483.11,-1264.67 0 top  (outside the outline)
J1  [JST-2-SMD]  -432.56,89.92 0 top  (outside the outline)
J2  [JST-2-SMD]  -405.89,-1102.36 0 top  (outside the outline)
J3  QIIC connector  [1X04_1MM_RA]  -449.83,-1220.72 0 top  (outside the outline)
J4  DF40FC-20DP-0.4V(51)  [DF40C-20DP-0.4V(51)']  -443.74,-1191.01 0 top  (outside the outline)
J5  DF40FC-20DP-0.4V(51)  [DF40C-20DP-0.4V(51)']  -443.74,-1198.63 0 top  (outside the outline)
MPU:C25  33pF  [0402-CAP]  -263.14,-813.31 0 top  (outside the outline)
MPU:C31  33pF  [0402-CAP]  -263.14,-816.36 0 top  (outside the outline)
MPU:C36  4.7uF (pol)  [0402-CAP]  -263.14,-774.45 0 top  (outside the outline)
MPU:C37  0.1uF  [0402-CAP]  -263.14,-777.49 0 top  (outside the outline)
MPU:C51  0.1uF  [0402-CAP]  -268.99,-855.73 0 top  (outside the outline)
MPU:J1  CORTEX_DEBUG_SMD  [SAMTECH_FTSH-105-01]  -261.62,-836.42 0 top  (outside the outline)
MPU:R7  10k  [0402-RES]  -277.37,-858.77 0 top  (outside the outline)
MPU:R10  4.7k  [0402-RES]  -268.99,-840.99 0 top  (outside the outline)
MPU:R11  10k  [0402-RES]  -268.99,-844.04 0 top  (outside the outline)
MPU:R12  10k  [0402-RES]  -268.99,-847.09 0 top  (outside the outline)
MPU:S3  EVPAYG0BAEVPAYG0BA  [EVPAYG0BA]  -269.75,-837.69 0 top  (outside the outline)
MPU:TP25  TPSTP06R  [TP06R]  -263.91,-781.56 0 top  (outside the outline)
MPU:U1  MKL03Z32VFK4RQFN24  [MKL03Z32VFK4R]  -495.05,-1293.88 0 top  (outside the outline)
MPU:U$1  AT45DB641E  [UDFN]  -448.56,-1215.39 0 top  (outside the outline)
MPU:Y1  CM519-SMD  [CM519]  -262.64,-771.14 0 top  (outside the outline)
REG:C1  10uF  [0805]  -371.86,-1106.68 0 top  (outside the outline)
REG:C2  10uF  [0805]  -374.9,-1106.68 0 top  (outside the outline)
REG:L2  [WE-TPC_2828_OLD]  -473.2,-1222.25 0 top  (outside the outline)
REG:R14  2M  [0402-RES]  -160.53,-296.42 0 top  (outside the outline)
REG:R15  2M  [0402-RES]  -160.53,-299.47 0 top  (outside the outline)
REG:R44  2M  [0402-RES]  -160.53,-302.51 0 top  (outside the outline)
REG:R45  2M  [0402-RES]  -160.53,-305.56 0 top  (outside the outline)
REG:R46  2M  [0402-RES]  -160.53,-308.61 0 top  (outside the outline)
REG:U1  TPS6274XWSON  [WSON-12]  -364.24,-1105.92 0 top  (outside the outline)
RF:C32  0.1uF  [0402-CAP]  -228.6,-649.48 0 top  (outside the outline)
RF:C33  10uF  [0402-CAP]  -228.6,-652.53 0 top  (outside the outline)
RF:C34  0.1uF  [0402-CAP]  -228.6,-655.57 0 top  (outside the outline)
RF:C35  22nF  [0402-CAP]  -228.6,-658.62 0 top  (outside the outline)
RF:TP1  TPTP06R  [TP06R]  -435.86,-1111 0 top  (outside the outline)
RF:TP2  TPTP06R  [TP06R]  -474.22,-1227.84 0 top  (outside the outline)
RF:TP19  TPTP06R  [TP06R]  -229.36,-662.69 0 top  (outside the outline)
RF:TP20  TPTP06R  [TP06R]  -229.36,-665.99 0 top  (outside the outline)
RF:TP21  TPTP06R  [TP06R]  -229.36,-669.29 0 top  (outside the outline)
RF:U12  PAN1326C  [PAN1326B]  -220.47,-642.62 0 top  (outside the outline)
RF:U13  SI4705  [SI4705]  -227.84,-644.91 0 top  (outside the outline)
RTC:C1  0.1uF  [0603-CAP]  -442.72,-1142.49 0 top  (outside the outline)
RTC:D2  250mA/100V  [SOD-323]  -442.21,-1148.33 0 top  (outside the outline)
RTC:D3  BAS70-05  [SOT23]  -442.72,-1153.67 0 top  (outside the outline)
RTC:R6  10k  [0402-RES]  -326.39,-1033.27 0 top  (outside the outline)
RTC:R40  10k  [0402-RES]  -326.39,-1036.32 0 top  (outside the outline)
RTC:TP12  TPSTP06R  [TP06R]  -327.15,-1040.38 0 top  (outside the outline)
RTC:U$5  RV-8803-C7_RTC  [RV-C7]  -325.88,-1016.76 0 top  (outside the outline)
RTC:U$6  ML414_BATTERY_CONTACT  [ML414]  -318.77,-1016.76 0 top  (outside the outline)
S1  CHS-02_SWITCH  [CHS-02_SWITCH]  -292.35,-896.11 0 top  (outside the outline)
S2  CHS-04_SWITCH  [CHS-04_SWITCH]  -415.29,-1101.6 0 top  (outside the outline)
SENSORS-1:C3  0.1uF  [0402-CAP]  -196.34,-488.44 0 top  (outside the outline)
SENSORS-1:C10  0.1uF  [0402-CAP]  -196.34,-398.53 0 top  (outside the outline)
SENSORS-1:C11  1uF  [0402-CAP]  -196.34,-401.57 0 top  (outside the outline)
SENSORS-1:C12  0.1uF  [0402-CAP]  -196.34,-404.62 0 top  (outside the outline)
SENSORS-1:C13  1uF  [0402-CAP]  -196.34,-407.67 0 top  (outside the outline)
SENSORS-1:C26  0.1uF  [0402-CAP]  -196.34,-441.2 0 top  (outside the outline)
SENSORS-1:C27  1uF  [0402-CAP]  -196.34,-444.25 0 top  (outside the outline)
SENSORS-1:C28  0.1uF  [0402-CAP]  -196.34,-447.29 0 top  (outside the outline)
SENSORS-1:C29  1uF  [0402-CAP]  -196.34,-450.34 0 top  (outside the outline)
SENSORS-1:C30  10uF  [0402-CAP]  -196.34,-491.49 0 top  (outside the outline)
SENSORS-1:C40  2.2uF  [0402-CAP]  -196.34,-494.54 0 top  (outside the outline)
SENSORS-1:C41  1.0uF  [0402-CAP]  -196.34,-497.59 0 top  (outside the outline)
SENSORS-1:C50  4.7uF  [0402-CAP]  -201.17,-504.19 0 top  (outside the outline)
SENSORS-1:C52  0.1uF  [0402-CAP]  -285.5,-898.4 0 top  (outside the outline)
SENSORS-1:C53  0.1uF  [0402-CAP]  -285.5,-901.45 0 top  (outside the outline)
SENSORS-1:R4  [0402]  -196.09,-501.14 0 top  (outside the outline)
SENSORS-1:U1  ADXL362  [ADXL362]  -191.52,-393.95 0 top  (outside the outline)
SENSORS-1:U2  BME680LGA  [BME680]  -195.83,-473.46 0 top  (outside the outline)
SENSORS-1:U3  BMX055  [BMX055]  -172.21,-381 0 top  (outside the outline)
SENSORS-1:U10  TCS34725FN  [TCS3772]  -186.69,-394.72 0 top  (outside the outline)
SENSORS-1:U11  GRIDEYE  [GRIDEYE-AMG88]  -191.77,-481.84 0 top  (outside the outline)
SENSORS-1:U17  CCS811  [LGA10]  -200.91,-498.86 0 top  (outside the outline)
SENSORS-1:U20  ISL23415UTQFN  [ISL23415]  -281.43,-894.59 0 top  (outside the outline)
SENSORS-1:U23  ISL23415UTQFN  [ISL23415]  -285.5,-894.59 0 top  (outside the outline)
SENSORS-2:C14  0.1uF  [0402-CAP]  -302.26,-925.83 0 top  (outside the outline)
SENSORS-2:C15  10uF  [0402-CAP]  -307.34,-938.02 0 top  (outside the outline)
SENSORS-2:C16  0.1uF  [0402-CAP]  -316.48,-977.39 0 top  (outside the outline)
SENSORS-2:C17  1uF  [0402-CAP]  -316.48,-980.44 0 top  (outside the outline)
SENSORS-2:C18  0.1uF  [0402-CAP]  -316.48,-966.98 0 top  (outside the outline)
SENSORS-2:C19  4.7uF  [0402-CAP]  -316.48,-970.03 0 top  (outside the outline)
SENSORS-2:C20  0.1uF  [0402-CAP]  -312.17,-954.79 0 top  (outside the outline)
SENSORS-2:C21  0.1uF  [0402-CAP]  -312.17,-957.83 0 top  (outside the outline)
SENSORS-2:C22  1uF  [0402-CAP]  -312.17,-944.12 0 top  (outside the outline)
SENSORS-2:C23  0.1uF  [0402-CAP]  -312.17,-947.17 0 top  (outside the outline)
SENSORS-2:C24  10nF (25V)  [0402-CAP]  -307.34,-934.97 0 top  (outside the outline)
SENSORS-2:C38  0.1uF  [0402-CAP]  -312.17,-960.88 0 top  (outside the outline)
SENSORS-2:C39  1uF  [0402-CAP]  -312.17,-963.93 0 top  (outside the outline)
SENSORS-2:C46  0.1uF  [0402-CAP]  -302.26,-928.88 0 top  (outside the outline)
SENSORS-2:C47  1uF  [0402-CAP]  -302.26,-931.93 0 top  (outside the outline)
SENSORS-2:C48  0.1uF  [0402-CAP]  -307.34,-941.07 0 top  (outside the outline)
SENSORS-2:U4  HDC1000  [HDC1000]  -316.23,-973.84 0 top  (outside the outline)
SENSORS-2:U5  L3GD20H  [L3GD20H]  -306.32,-930.66 0 top  (outside the outline)
SENSORS-2:U7  MAG3110  [MAG3110]  -311.91,-950.98 0 top  (outside the outline)
SENSORS-2:U8  MMA8451Q  [MMA8451Q]  -302.01,-921.51 0 top  (outside the outline)
SENSORS-2:U9  SI7021  [SI7021]  -310.9,-939.8 0 top  (outside the outline)
SENSORS-2:U16  LPS25H  [LPS25H]  -316.23,-962.91 0 top  (outside the outline)
USB:C61  4.7uF (pol)  [0402-CAP]  -358.39,-1073.91 0 top  (outside the outline)
USB:C66  0.1uF  [0402-CAP]  -358.39,-1076.96 0 top  (outside the outline)
USB:FB1  600R/1A  [0603]  -358.39,-1089.66 0 top  (outside the outline)
USB:J7  ZX62-AB-5PA(31)MICRO-AB-SMT  [ZX62-AB-5PA(31)]  -353.82,-1084.83 0 top  (outside the outline)
USB:TP1  TPSTP06R  [TP06R]  -359.16,-1093.72 0 top  (outside the outline)

## Library data of the parts
BOOST:C1 BOOST:C2 BOOST:C4-BOOST:C8 = CPX3225A752D
BOOST:C9 = CPX3225A752D; SPICEPREFIX: C
BOOST:C42 BOOST:C44 = SparkFun-Passives; PN: C0805C475K9RACTU
BOOST:C43 = SparkFun-Passives; PN: 02016D104KAT2A
BOOST:C45 = SparkFun-Passives; PN: GRM188R71H103KA01D
BOOST:C49 = SparkFun-Passives; PN: JMK212BJ226KG-T
BOOST:L2 = EMCComponents (rev19c); WE-NUMBER: 744031220/22uH
BOOST:L3 = EMCComponents (rev19c); WE-NUMBER: 744029100/10uH
BOOST:R16-BOOST:R22 CHARGER:C1-CHARGER:C3 CHARGER:R1-CHARGER:R6 FPGA:C2-FPGA:C6 FPGA:C10-FPGA:C14 FPGA:C76 FPGA:C79 FPGA:R27 FPGA:R41-FPGA:R43 FT4222:C1 FT4222:C2 FT4222:C62-FT4222:C65 MPU:C25 MPU:C31 MPU:C36 MPU:C37 MPU:C51 MPU:R7 MPU:R10-MPU:R12 REG:C1 REG:C2 REG:R14 REG:R15 REG:R44-REG:R46 RF:C32-RF:C35 RTC:C1 RTC:R6 RTC:R40 SENSORS-1:C3 SENSORS-1:C10-SENSORS-1:C13 SENSORS-1:C26-SENSORS-1:C30 SENSORS-1:C40 SENSORS-1:C41 SENSORS-1:C50 SENSORS-1:C52 SENSORS-1:C53 SENSORS-2:C14-SENSORS-2:C24 SENSORS-2:C38 SENSORS-2:C39 SENSORS-2:C46-SENSORS-2:C48 USB:C61 USB:C66 USB:FB1 = SparkFun-Passives
BOOST:TP1-BOOST:TP4 CHARGER:TP1 CHARGER:TP2 FPGA:TP11 MPU:TP25 RF:TP1 RF:TP2 RF:TP19-RF:TP21 RTC:TP12 USB:TP1 = testpad
BOOST:U21 = BQ25570
CHARGER:D1 CHARGER:D2 = SparkFun-LED
CHARGER:U$1 = BQ24230
DF40_SOCKETS:J1 DF40_SOCKETS:J2 = DF40C-20DS-0.4V(51)
FD1-FD5 = SparkFun-Aesthetics
FPGA:D1 = SparkFun-LED; PROD_ID: DIO-08575
FPGA:L1 = WURTH-744025002
FPGA:U$1 = TPS62746
FPGA:U$7 = ICE40UP5K
FT4222:R5 FT4222:R8 FT4222:R9 FT4222:R23 FT4222:R25 SENSORS-1:R4 = SparkFun-Resistors
FT4222:U18 = FT4222H
FT4222:Y2 = CS325
J1 J2 = SparkFun-Connectors; PROD_ID: CONN-11443; SF_ID: PRT-08612
J3 = SparkX
J4 J5 = DF40FC-20DP-0.4V(51)
MPU:J1 = SparkFun-Connectors
MPU:S3 = EVPAYG0BA
MPU:U1 = MKL03Z32VFK4R
MPU:U$1 = AT45D_Flash
MPU:Y1 = CM519
REG:L2 = EMCComponents (rev19c); WE-NUMBER: 744025002/2,2uH
REG:U1 = TPS6274x
RF:U12 = PAN1326B
RF:U13 = SI4705
RTC:D2 = SparkFun-DiscreteSemi; PROD_ID: DIO-09646
RTC:D3 = diode
RTC:U$5 = Micro Crystal RTC
RTC:U$6 = ML414
S1 S2 = CHS_SWITCH
SENSORS-1:U1 = ADXL362
SENSORS-1:U2 = BME680
SENSORS-1:U3 = BMX055
SENSORS-1:U10 = TCS3772
SENSORS-1:U11 = Grideye
SENSORS-1:U17 = SparkFun-Sensors; PROD_ID: IC-13607
SENSORS-1:U20 SENSORS-1:U23 = ISL23415
SENSORS-2:U4 = HDC1000
SENSORS-2:U5 = L3GD20H
SENSORS-2:U7 = MAG3110
SENSORS-2:U8 = MMA8451Q
SENSORS-2:U9 = SI7021
SENSORS-2:U16 = LPS25H
USB:J7 = ZX62-AB-5PA(31)

## Nets
ADXL362_FT4222_SPI_CS: FT4222:U18.P$17 J4.P$18 MPU:U1.P$15 SENSORS-1:U1.P$8
BAT: CHARGER:C3.1 CHARGER:TP1.TP CHARGER:U$1.2 CHARGER:U$1.3 J1.2
BOOST:LBOOST: BOOST:L2.2 BOOST:U21.20
BOOST:LBUCK: BOOST:L3.1 BOOST:U21.16
BOOST:OK_HYST: BOOST:R17.1 BOOST:R19.2 BOOST:U21.10
BOOST:OK_PROG: BOOST:R18.2 BOOST:R19.1 BOOST:U21.11
BOOST:VBAT_OV: BOOST:R16.1 BOOST:R20.2 BOOST:U21.7
BOOST:VOUT_SET: BOOST:R21.1 BOOST:R22.2 BOOST:U21.12
BOOST:VRDIV: BOOST:R16.2 BOOST:R17.2 BOOST:R21.2 BOOST:U21.8
BOOST:VREF_SAMP: BOOST:C45.1 BOOST:U21.4
BOOST:VSTOR: BOOST:C42.1 BOOST:C43.1 BOOST:TP4.TP BOOST:U21.3 BOOST:U21.6 BOOST:U21.19
BOOST_EN: BOOST:U21.5 S2.1' S2.2'
BOOST_VBAT: BOOST:C1.+ BOOST:C2.+ BOOST:C4.+ BOOST:C5.+ BOOST:C6.+ BOOST:C7.+ BOOST:C8.+ BOOST:C9.+ BOOST:TP3.TP BOOST:U21.18 S2.2
BOOST_VOUT: BOOST:C49.1 BOOST:L3.2 BOOST:TP2.TP BOOST:U21.14 S2.3
CHARGE_VOUT: CHARGER:C2.1 CHARGER:D1.A CHARGER:D2.A CHARGER:TP2.TP CHARGER:U$1.10 CHARGER:U$1.11 S2.4
CHARGER:N$1: CHARGER:R2.2 CHARGER:U$1.16
CHARGER:N$2: CHARGER:R1.2 CHARGER:U$1.12
CHARGER:N$3: CHARGER:R4.1 CHARGER:U$1.7
CHARGER:N$4: CHARGER:R3.2 CHARGER:U$1.1
CHARGER:N$5: CHARGER:R5.1 CHARGER:U$1.9
CHARGER:N$6: CHARGER:D1.C CHARGER:R4.2
CHARGER:N$7: CHARGER:D2.C CHARGER:R5.2
CHARGER:N$8: CHARGER:R6.2 CHARGER:U$1.14
DF40_SOCKETS:P1A: DF40_SOCKETS:J1.P$1
DF40_SOCKETS:P1B: DF40_SOCKETS:J2.P$1
DF40_SOCKETS:P2A: DF40_SOCKETS:J1.P$2
DF40_SOCKETS:P2B: DF40_SOCKETS:J2.P$2
DF40_SOCKETS:P3A: DF40_SOCKETS:J1.P$3
DF40_SOCKETS:P3B: DF40_SOCKETS:J2.P$3
DF40_SOCKETS:P4A: DF40_SOCKETS:J1.P$4
DF40_SOCKETS:P4B: DF40_SOCKETS:J2.P$4
DF40_SOCKETS:P5A: DF40_SOCKETS:J1.P$5
DF40_SOCKETS:P5B: DF40_SOCKETS:J2.P$5
DF40_SOCKETS:P6A: DF40_SOCKETS:J1.P$6
DF40_SOCKETS:P6B: DF40_SOCKETS:J2.P$6
DF40_SOCKETS:P7A: DF40_SOCKETS:J1.P$7
DF40_SOCKETS:P7B: DF40_SOCKETS:J2.P$7
DF40_SOCKETS:P8A: DF40_SOCKETS:J1.P$8
DF40_SOCKETS:P8B: DF40_SOCKETS:J2.P$8
DF40_SOCKETS:P9A: DF40_SOCKETS:J1.P$9
DF40_SOCKETS:P9B: DF40_SOCKETS:J2.P$9
DF40_SOCKETS:P10A: DF40_SOCKETS:J1.P$10
DF40_SOCKETS:P10B: DF40_SOCKETS:J2.P$10
DF40_SOCKETS:P11A: DF40_SOCKETS:J1.P$11
DF40_SOCKETS:P11B: DF40_SOCKETS:J2.P$11
DF40_SOCKETS:P12A: DF40_SOCKETS:J1.P$12
DF40_SOCKETS:P12B: DF40_SOCKETS:J2.P$12
DF40_SOCKETS:P13A: DF40_SOCKETS:J1.P$13
DF40_SOCKETS:P13B: DF40_SOCKETS:J2.P$13
DF40_SOCKETS:P14A: DF40_SOCKETS:J1.P$14
DF40_SOCKETS:P14B: DF40_SOCKETS:J2.P$14
DF40_SOCKETS:P15A: DF40_SOCKETS:J1.P$15
DF40_SOCKETS:P15B: DF40_SOCKETS:J2.P$15
DF40_SOCKETS:P16A: DF40_SOCKETS:J1.P$16
DF40_SOCKETS:P16B: DF40_SOCKETS:J2.P$16
DF40_SOCKETS:P17A: DF40_SOCKETS:J1.P$17
DF40_SOCKETS:P17B: DF40_SOCKETS:J2.P$17
DF40_SOCKETS:P18A: DF40_SOCKETS:J1.P$18
DF40_SOCKETS:P18B: DF40_SOCKETS:J2.P$18
DF40_SOCKETS:P19A: DF40_SOCKETS:J1.P$19
DF40_SOCKETS:P19B: DF40_SOCKETS:J2.P$19
DF40_SOCKETS:P20A: DF40_SOCKETS:J1.P$20
DF40_SOCKETS:P20B: DF40_SOCKETS:J2.P$20
FPGA:CRESET_B: FPGA:R43.1 FPGA:U$7.F3
FPGA:ICE40_VCC_PLL: FPGA:C5.1 FPGA:C6.1 FPGA:R27.1 FPGA:U$7.B2
FPGA:IOB_0A: FPGA:D1.A FPGA:U$7.E5
FPGA:IOB_35B_SPI_SS: FPGA:R42.2
FPGA:N$1: FPGA:D1.C FPGA:R41.1
FPGA:N$2: FPGA:L1.1 FPGA:U$1.A1
FPGA:VCC_1V2: FPGA:L1.2 FPGA:R27.2 FPGA:TP11.TP FPGA:U$1.C2 FPGA:U$7.C2
FPGA_CS: FPGA:U$7.C1 MPU:U1.P$7
FPGA_VS: FPGA:C3.1 FPGA:C4.1 FPGA:C10.1 FPGA:C11.1 FPGA:C12.1 FPGA:C13.1 FPGA:C14.1 FPGA:C76.1 FPGA:C79.1 FPGA:R43.2 FPGA:U$1.B1 FPGA:U$7.A3 FPGA:U$7.C4 FPGA:U$7.D2 FPGA:U$7.D4 S1.1' S1.2'
FT4222:FT4222_VOUT3V3: FT4222:U18.P$25
FT4222:GPIO2: FT4222:U18.P$15
FT4222:GPIO3: FT4222:U18.P$16
FT4222:N$2: FT4222:R23.2 FT4222:U18.P$32
FT4222:N$3: FT4222:R8.2 FT4222:U18.P$2
FT4222:N$4: FT4222:C62.1 FT4222:R5.1 FT4222:U18.P$3
FT4222:N$5: FT4222:C63.1 FT4222:R9.2 FT4222:U18.P$21
FT4222:N$6: FT4222:C64.1 FT4222:R25.1 FT4222:U18.P$18 FT4222:Y2.3
FT4222:N$15: FT4222:C65.1 FT4222:R25.2 FT4222:U18.P$19 FT4222:Y2.1
FT4222:VPP: FT4222:U18.P$29
GND: BOOST:C1.- BOOST:C2.- BOOST:C4.- BOOST:C5.- BOOST:C6.- BOOST:C7.- BOOST:C8.- BOOST:C9.- BOOST:C42.2 BOOST:C43.2 BOOST:C44.2 BOOST:C45.2 BOOST:C49.2 BOOST:R18.1 BOOST:R20.1 BOOST:R22.1 BOOST:U21.1 BOOST:U21.9 BOOST:U21.15 BOOST:U21.17 BOOST:U21.21 CHARGER:C1.2 CHARGER:C2.2 CHARGER:C3.2 CHARGER:R1.1 CHARGER:R2.1 CHARGER:R3.1 CHARGER:R6.1 CHARGER:U$1.4 CHARGER:U$1.6 CHARGER:U$1.8 CHARGER:U$1.15 CHARGER:U$1.EP FPGA:C2.2 FPGA:C3.2 FPGA:C4.2 FPGA:C5.2 FPGA:C6.2 FPGA:C10.2 FPGA:C11.2 FPGA:C12.2 FPGA:C13.2 FPGA:C14.2 FPGA:C76.2 FPGA:C79.2 FPGA:R41.2 FPGA:R42.1 FPGA:U$1.B2 FPGA:U$1.C1 FPGA:U$7.B4 FPGA:U$7.E2 FT4222:C1.2 FT4222:C2.2 FT4222:C62.2 FT4222:C63.2 FT4222:C64.2 FT4222:C65.2 FT4222:R9.1 FT4222:U18.P$4 FT4222:U18.P$5 FT4222:U18.P$6 FT4222:U18.P$20 FT4222:U18.P$24 FT4222:U18.P$27 FT4222:U18.P$28 J1.1 J2.1 J3.1 J4.P$1 J5.P$1 MPU:C25.2 MPU:C31.2 MPU:C51.2 MPU:J1.3 MPU:J1.5 MPU:R12.2 MPU:S3.B MPU:S3.B' MPU:U1.P$4 MPU:U1.P$PAD MPU:U$1.7 MPU:U$1.9 REG:C1.2 REG:C2.2 REG:R14.1 REG:R15.1 REG:R44.1 REG:R45.1 REG:R46.1 REG:U1.3 RF:U12.P$1 RF:U12.P$12 RF:U12.P$14 RF:U12.P$20 RF:U13.P$3 RF:U13.P$6 RF:U13.P$12 RF:U13.P$21 RTC:C1.2 RTC:U$5.4 RTC:U$5.5 RTC:U$6.2 S2.1 SENSORS-1:C26.2 SENSORS-1:C27.2 SENSORS-1:C41.1 SENSORS-1:C41.2 SENSORS-1:R4.2 SENSORS-1:U1.P$12 SENSORS-1:U1.P$13 SENSORS-1:U1.P$16 SENSORS-1:U2.1 SENSORS-1:U2.7 SENSORS-1:U3.P$4 SENSORS-1:U3.P$6 SENSORS-1:U3.P$12 SENSORS-1:U3.P$17 SENSORS-1:U3.P$20 SENSORS-1:U10.P$3 SENSORS-1:U11.5 SENSORS-1:U11.6 SENSORS-1:U11.10 SENSORS-1:U17.1 SENSORS-1:U17.7 SENSORS-1:U17.EP SENSORS-1:U20.9 SENSORS-1:U23.9 SENSORS-2:C18.2 SENSORS-2:C19.2 SENSORS-2:C20.2 SENSORS-2:C21.2 SENSORS-2:C24.2 SENSORS-2:U4.B2 SENSORS-2:U5.P$4 SENSORS-2:U5.P$9 SENSORS-2:U5.P$10 SENSORS-2:U5.P$11 SENSORS-2:U5.P$12 SENSORS-2:U5.P$13 SENSORS-2:U5.P$15 SENSORS-2:U7.P$5 SENSORS-2:U7.P$10 SENSORS-2:U8.P$5 SENSORS-2:U8.P$7 SENSORS-2:U8.P$10 SENSORS-2:U8.P$12 SENSORS-2:U9.P$2 SENSORS-2:U16.P$3 SENSORS-2:U16.P$5 SENSORS-2:U16.P$8 SENSORS-2:U16.P$9 USB:C61.2 USB:C66.2 USB:J7.4 USB:J7.5
I2C0_SCL/UART_TX: FT4222:U18.P$13 J3.4 J4.P$11 MPU:U1.P$17 RF:U12.P$5 RTC:U$5.8
I2C0_SDA/UART_RX: FT4222:U18.P$14 J3.3 J4.P$12 MPU:U1.P$18 RF:U12.P$6 RTC:U$5.1
I2C1_SCL: FPGA:U$7.C3 J4.P$13 SENSORS-1:U2.4 SENSORS-1:U3.P$9 SENSORS-1:U10.P$2 SENSORS-1:U11.3 SENSORS-1:U17.10 SENSORS-1:U20.6
I2C1_SDA: FPGA:U$7.F4 J4.P$14 SENSORS-1:U2.3 SENSORS-1:U3.P$11 SENSORS-1:U10.P$6 SENSORS-1:U11.2 SENSORS-1:U17.9 SENSORS-1:U23.6
I2C2_SCL: FPGA:U$7.A2 J4.P$15 RF:U13.P$7 SENSORS-2:U4.A1 SENSORS-2:U5.P$2 SENSORS-2:U7.P$7 SENSORS-2:U8.P$4 SENSORS-2:U9.P$6 SENSORS-2:U16.P$2
I2C2_SDA: FPGA:U$7.A1 J4.P$16 RF:U13.P$8 SENSORS-2:U4.A2 SENSORS-2:U5.P$3 SENSORS-2:U7.P$6 SENSORS-2:U8.P$6 SENSORS-2:U9.P$1 SENSORS-2:U16.P$4
IOB_2A: FPGA:U$7.D5
IOB_3B_G6: FPGA:U$7.F5
IOB_9B: FPGA:U$7.E4
IOB_12A_G4_CDONE: FPGA:U$7.D3
IOB_13B: FPGA:U$7.E3
IOB_24A: FPGA:U$7.B1
IOB_25B_G3: FPGA:U$7.F2
IOT_46B_G0: FPGA:U$7.B3
IOT_47A: FPGA:U$7.A4
ISL23415_SPI_CS: J4.P$17 MPU:U1.P$20 SENSORS-1:U20.4 SENSORS-1:U23.4
KL03_CLKOUT32K: MPU:U1.P$21 RF:U12.P$8 RF:U13.P$9
MPU:AT45DB321F_SPI_CS: MPU:U1.P$16 MPU:U$1.4
MPU:EXTAL0: MPU:C31.1 MPU:U1.P$5 MPU:Y1.P$1
MPU:N$4: MPU:R7.1 MPU:U$1.5
MPU:N$5: MPU:C37.2
MPU:N$6: MPU:C36.2
MPU:XTAL0: MPU:C25.1 MPU:U1.P$6 MPU:Y1.P$2
N$1: FT4222:U18.P$23 USB:J7.3
N$2: FT4222:U18.P$22 USB:J7.2
PAN1326_!SHUTD: J4.P$20 MPU:U1.P$13 RF:U12.P$16
PV_VS: BOOST:C44.1 BOOST:L2.1 BOOST:TP1.TP BOOST:U21.2 J2.2 J5.P$2
REG:SW: REG:L2.1 REG:U1.2
REG_CTRL: MPU:U1.P$19 REG:R14.2 REG:U1.4
REG_VIN: REG:C2.1 REG:U1.1 REG:U1.12 S2.3' S2.4'
REG_VSEL1: MPU:U1.P$1 REG:R44.2 REG:U1.11
REG_VSEL2: MPU:U1.P$2 REG:R45.2 REG:U1.10
REG_VSEL3: MPU:U1.P$9 REG:R46.2 REG:U1.9
REG_VSEL4: MPU:U1.P$10 REG:R15.2 REG:U1.8
RF:N$1: RF:C32.2
RF:N$2: RF:C33.2
RF:N$3: RF:C35.2
RF:N$4: RF:C34.2
RF:PAN1326_AUD_CLK: RF:U12.P$19 RF:U13.P$17
RF:PAN1326_AUD_FSYNC: RF:U12.P$7 RF:U13.P$16
RF:PAN1326_AUD_IN: RF:U12.P$18 RF:U13.P$15
RF:PAN1326_AUD_OUT: RF:TP20.TP RF:U12.P$17
RF:PAN1326_RF: RF:TP21.TP RF:U12.P$13
RF:PAN1326_TX_DBG: RF:TP19.TP RF:U12.P$2
RF:SI4705_GPO1: RF:U13.P$19
RF:SI4705_GPO2: RF:U13.P$18
RF:SI4705_LPI: RF:TP1.TP RF:U13.P$4
RGB0: FPGA:U$7.A5
RGB1: FPGA:U$7.B5
RGB2: FPGA:U$7.C5
RTC:N$1: RTC:C1.1 RTC:D2.C RTC:D3.3 RTC:U$5.3
RTC:N$3: RTC:R6.1 RTC:U$5.7
RTC:VBB: RTC:D2.A RTC:TP12.TP RTC:U$6.1 RTC:U$6.3
RTC_!INT!/RESET_B: J4.P$7 J5.P$5 MPU:J1.10 MPU:R10.1 MPU:S3.A MPU:S3.A' MPU:U1.P$23 RTC:R40.1 RTC:U$5.6
SENSORS-1:N$7: SENSORS-1:U17.4 SENSORS-1:U17.5
SENSORS-1:N$8: SENSORS-1:C10.2
SENSORS-1:N$9: SENSORS-1:C11.2
SENSORS-1:N$10: SENSORS-1:C12.2
SENSORS-1:N$11: SENSORS-1:C13.2
SENSORS-1:N$18: SENSORS-1:C28.2
SENSORS-1:N$19: SENSORS-1:C29.2
SENSORS-1:N$20: SENSORS-1:C3.2
SENSORS-1:N$21: SENSORS-1:C30.2
SENSORS-1:N$22: SENSORS-1:C40.2
SENSORS-1:N$23: SENSORS-1:R4.1
SENSORS-1:N$24: SENSORS-1:C52.2
SENSORS-1:N$25: SENSORS-1:C50.2
SENSORS-1:N$27: SENSORS-1:C53.2
SENSORS-2:N$1: SENSORS-2:C14.1 SENSORS-2:U8.P$2
SENSORS-2:N$2: SENSORS-2:C14.2
SENSORS-2:N$6: SENSORS-2:C46.2 SENSORS-2:C47.2
SENSORS-2:N$11: SENSORS-2:U5.P$5
SENSORS-2:N$12: SENSORS-2:C15.2 SENSORS-2:C48.2
SENSORS-2:N$13: SENSORS-2:C23.2
SENSORS-2:N$14: SENSORS-2:C22.2
SENSORS-2:N$17: SENSORS-2:C20.1 SENSORS-2:C21.1 SENSORS-2:U7.P$1 SENSORS-2:U7.P$4
SENSORS-2:N$18: SENSORS-2:C38.2 SENSORS-2:C39.2
SENSORS-2:N$27: SENSORS-2:C16.2
SENSORS-2:N$28: SENSORS-2:C17.2
SI4705_!RST!: J4.P$19 MPU:U1.P$14 RF:U13.P$5
SI4705_FMI: J5.P$6 RF:TP2.TP RF:U13.P$2
SPI_MISO/UART_RTS: FPGA:U$7.F1 FT4222:U18.P$9 J4.P$9 MPU:U1.P$11 MPU:U$1.1 RF:U12.P$4 SENSORS-1:U1.P$7 SENSORS-1:U20.2 SENSORS-1:U23.2
SPI_MOSI/UART_CTS: FPGA:U$7.E1 FT4222:U18.P$10 J4.P$10 MPU:U1.P$8 MPU:U$1.8 RF:U12.P$3 SENSORS-1:U1.P$6 SENSORS-1:U20.3 SENSORS-1:U23.3
SPI_SCK: FPGA:U$7.D1 FT4222:U18.P$8 J4.P$8 MPU:U1.P$12 MPU:U$1.2 SENSORS-1:U1.P$4 SENSORS-1:U20.1 SENSORS-1:U23.1
SWD_CLK: J4.P$6 J5.P$4 MPU:J1.4 MPU:R12.1 MPU:U1.P$22
SWD_DIO: J4.P$5 J5.P$3 MPU:J1.2 MPU:R11.1 MPU:U1.P$24
USB:VBUS: USB:FB1.2 USB:J7.1
USB_5V: CHARGER:C1.1 CHARGER:U$1.13 FPGA:C2.1 FPGA:U$1.A2 FT4222:C1.1 FT4222:C2.1 FT4222:U18.P$26 FT4222:U18.P$30 J4.P$2 USB:C61.1 USB:C66.1 USB:FB1.1 USB:TP1.TP
VCC: J3.2
VS_PRI: FT4222:R5.2 FT4222:R8.1 FT4222:R23.1 FT4222:U18.P$1 FT4222:U18.P$7 J4.P$4 MPU:C36.1 MPU:C37.1 MPU:C51.1 MPU:J1.1 MPU:R7.2 MPU:R10.2 MPU:R11.2 MPU:TP25.TP MPU:U1.P$3 MPU:U$1.3 MPU:U$1.6 REG:C1.1 REG:L2.2 REG:U1.5 RTC:D3.1 RTC:D3.2 RTC:R6.2 RTC:R40.2 S1.1
VS_SEC: J4.P$3 REG:U1.6 RF:C32.1 RF:C33.1 RF:C34.1 RF:C35.1 RF:U12.P$10 RF:U12.P$11 RF:U12.P$15 RF:U12.P$22 RF:U13.P$10 RF:U13.P$11 S1.2 SENSORS-1:C3.1 SENSORS-1:C10.1 SENSORS-1:C11.1 SENSORS-1:C12.1 SENSORS-1:C13.1 SENSORS-1:C26.1 SENSORS-1:C27.1 SENSORS-1:C28.1 SENSORS-1:C29.1 SENSORS-1:C30.1 SENSORS-1:C40.1 SENSORS-1:C50.1 SENSORS-1:C52.1 SENSORS-1:C53.1 SENSORS-1:U1.P$1 SENSORS-1:U1.P$14 SENSORS-1:U2.2 SENSORS-1:U2.5 SENSORS-1:U2.6 SENSORS-1:U2.8 SENSORS-1:U3.P$3 SENSORS-1:U3.P$7 SENSORS-1:U3.P$13 SENSORS-1:U10.P$1 SENSORS-1:U11.9 SENSORS-1:U11.12 SENSORS-1:U11.13 SENSORS-1:U17.2 SENSORS-1:U17.6 SENSORS-1:U20.5 SENSORS-1:U20.8 SENSORS-1:U20.10 SENSORS-1:U23.5 SENSORS-1:U23.8 SENSORS-1:U23.10 SENSORS-2:C15.1 SENSORS-2:C16.1 SENSORS-2:C17.1 SENSORS-2:C18.1 SENSORS-2:C19.1 SENSORS-2:C22.1 SENSORS-2:C23.1 SENSORS-2:C24.1 SENSORS-2:C38.1 SENSORS-2:C39.1 SENSORS-2:C46.1 SENSORS-2:C47.1 SENSORS-2:C48.1 SENSORS-2:U4.B1 SENSORS-2:U4.C1 SENSORS-2:U4.D1 SENSORS-2:U5.P$1 SENSORS-2:U5.P$14 SENSORS-2:U5.P$16 SENSORS-2:U7.P$2 SENSORS-2:U7.P$8 SENSORS-2:U8.P$1 SENSORS-2:U8.P$14 SENSORS-2:U9.P$5 SENSORS-2:U16.P$1 SENSORS-2:U16.P$6 SENSORS-2:U16.P$10

## Tracks (layer width: path | path; a pad name or v marks a point on that pad's centre or on a via)
ADXL362_FT4222_SPI_CS  (3 unrouted)
BAT  (4 unrouted)
BOOST:LBOOST  (1 unrouted)
BOOST:LBUCK  (1 unrouted)
BOOST:OK_HYST  (2 unrouted)
BOOST:OK_PROG  (2 unrouted)
BOOST:VBAT_OV  (2 unrouted)
BOOST:VOUT_SET  (2 unrouted)
BOOST:VRDIV  (3 unrouted)
BOOST:VREF_SAMP  (1 unrouted)
BOOST:VSTOR  (5 unrouted)
BOOST_EN  (2 unrouted)
BOOST_VBAT  (via drill 0.65)  (13 unrouted)
  Route14 0.127: 4.19,39.38 4.19,41.66
  other vias: 36.83,29.46 16.51,57.4
  pour Route14: 0.49,39.38 37.54,39.38 37.54,12.52 33.27,12.52 33.27,0.49 0.49,0.49
  pour Route14: 0.51,41.66 18.03,41.66 18.03,73.66 0.51,73.66
BOOST_VIN
  cutout Top: 33.27,12.45 37.59,12.45 37.59,0.25 33.27,0.25
  cutout Top: 33.27,12.45 37.59,12.45 37.59,0.25 33.27,0.25
  cutout Bottom: 37.59,12.45 33.27,12.45 33.27,0.25 37.59,0.25
  cutout Route2: 37.59,12.45 33.27,12.45 33.27,0.25 37.59,0.25
  cutout Route3: 37.59,12.45 33.27,12.45 33.27,0.25 37.59,0.25
  cutout Route4: 37.59,12.45 33.27,12.45 33.27,0.25 37.59,0.25
  cutout Route5: 37.59,12.45 33.27,12.45 33.27,0.25 37.59,0.25
  cutout Route6: 37.59,12.45 33.27,12.45 33.27,0.25 37.59,0.25
  cutout Route7: 37.59,12.45 33.27,12.45 33.27,0.25 37.59,0.25
  cutout Route14: 37.59,12.45 33.27,12.45 33.27,0.25 37.59,0.25
  cutout Route15: 37.59,12.45 33.27,12.45 33.27,0.25 37.59,0.25
BOOST_VOUT  (4 unrouted)
CHARGE_VOUT  (6 unrouted)
CHARGER:N$1  (1 unrouted)
CHARGER:N$2  (1 unrouted)
CHARGER:N$3  (1 unrouted)
CHARGER:N$4  (1 unrouted)
CHARGER:N$5  (1 unrouted)
CHARGER:N$6  (1 unrouted)
CHARGER:N$7  (1 unrouted)
CHARGER:N$8  (1 unrouted)
FPGA:CRESET_B  (1 unrouted)
FPGA:ICE40_VCC_PLL  (3 unrouted)
FPGA:IOB_0A  (1 unrouted)
FPGA:N$1  (1 unrouted)
FPGA:N$2  (1 unrouted)
FPGA:VCC_1V2  (4 unrouted)
FPGA_CS  (1 unrouted)
FPGA_VS  (16 unrouted)
FT4222:N$2  (1 unrouted)
FT4222:N$3  (1 unrouted)
FT4222:N$4  (2 unrouted)
FT4222:N$5  (2 unrouted)
FT4222:N$6  (3 unrouted)
FT4222:N$15  (3 unrouted)
GND  (via drill 0.2, 0.3, 0.65)  (159 unrouted)
  other vias: 36.83,13.21 28.5,14.48 32.51,65.53 28.45,61.47 32.51,61.47
  pour Route2: 0.49,39.38 37.54,39.38 37.54,12.52 33.27,12.52 33.27,0.49 0.49,0.49
  pour Route15: 0.49,0.49 33.27,0.49 33.27,12.52 37.54,12.52 37.54,39.38 0.49,39.38
  pour Route6: 0.49,39.38 37.54,39.38 37.54,12.52 33.27,12.52 33.27,0.49 0.49,0.49
  pour Top: 2.98,10.12 4.17,10.12 4.17,9.52 2.98,9.52
  pour Route2: 18.03,41.91 18.03,73.66 0.51,73.66 0.51,42.16 17.78,42.16
  pour Route6: 20.57,73.66 47.5,73.66 47.5,54.86 20.57,54.86
  pour Route2: 20.32,54.36 20.32,73.66 47.5,73.66 47.5,54.61 34.8,54.61 34.29,54.1 20.57,54.1
  pour Route15: 0.51,42.16 0.51,73.66 18.29,73.66 18.29,41.4 0.51,41.4
  pour Route15: 47.5,73.91 47.5,54.61 20.32,54.61 20.32,73.66 45.21,73.66 45.72,73.66 45.97,73.91
I2C0_SCL/UART_TX  (5 unrouted)
I2C0_SDA/UART_RX  (5 unrouted)
I2C1_SCL  (7 unrouted)
I2C1_SDA  (7 unrouted)
I2C2_SCL  (8 unrouted)
I2C2_SDA  (8 unrouted)
ICE40_VCC_1V2  (via drill 0.61)
  other vias: 44.2,62.99
  pour Route5: 20.57,73.66 47.5,73.66 47.5,54.86 20.57,54.86
ICE40_VCCIO  (via drill 0.61)  (1 unrouted)
  other vias: 42.16,69.85 44.2,67.56
  pour Route7: 20.57,73.66 47.5,73.66 47.5,54.86 20.57,54.86
ISL23415_SPI_CS  (3 unrouted)
KL03_CLKOUT32K  (2 unrouted)
MPU:AT45DB321F_SPI_CS  (1 unrouted)
MPU:EXTAL0  (2 unrouted)
MPU:N$4  (1 unrouted)
MPU:XTAL0  (2 unrouted)
N$1  (1 unrouted)
N$2  (1 unrouted)
PAN1326_!SHUTD  (2 unrouted)
PV_VS  (5 unrouted)
REG:SW  (1 unrouted)
REG_CTRL  (2 unrouted)
REG_VIN  (4 unrouted)
REG_VSEL1  (2 unrouted)
REG_VSEL2  (2 unrouted)
REG_VSEL3  (2 unrouted)
REG_VSEL4  (2 unrouted)
RF:PAN1326_AUD_CLK  (1 unrouted)
RF:PAN1326_AUD_FSYNC  (1 unrouted)
RF:PAN1326_AUD_IN  (1 unrouted)
RF:PAN1326_AUD_OUT  (1 unrouted)
RF:PAN1326_RF  (1 unrouted)
RF:PAN1326_TX_DBG  (1 unrouted)
RF:SI4705_LPI  (1 unrouted)
RTC:N$1  (3 unrouted)
RTC:N$3  (1 unrouted)
RTC:VBB  (3 unrouted)
RTC_!INT!/RESET_B  (8 unrouted)
SCALED_SENSOR_SUPPLY  (via drill 0.2)
  other vias: 6.87,21.22
  pour Route5: 0.49,39.38 37.54,39.38 37.54,12.52 33.27,12.52 33.27,0.49 0.49,0.49
SENSORS-1:N$7  (1 unrouted)
SENSORS-2:N$1  (1 unrouted)
SENSORS-2:N$6  (1 unrouted)
SENSORS-2:N$12  (1 unrouted)
SENSORS-2:N$17  (3 unrouted)
SENSORS-2:N$18  (1 unrouted)
SI4705_!RST!  (2 unrouted)
SI4705_FMI  (2 unrouted)
SPI_MISO/UART_RTS  (8 unrouted)
SPI_MOSI/UART_CTS  (8 unrouted)
SPI_SCK  (7 unrouted)
SWD_CLK  (4 unrouted)
SWD_DIO  (4 unrouted)
USB:VBUS  (1 unrouted)
USB_5V  (12 unrouted)
VS_PRI  (24 unrouted)
VS_SEC  (74 unrouted)

## Text on the board
Top: Warp Rev. B, Top | VBATT | GND
Bottom: Warp Rev. B, Bottom
tPlace: 12 | VBATT | 1 | GND | SS | S+ | +Haggis/Ipsa | VB | SSSPLY | REV B | VBOOSTIN | S/N
bPlace: 1 | 4 | 1 | 4 | 20 | 20 | Designed by PSM in Cambridge, MA/UK